# Altium PCB Voltage supply of sEMG & ADC(1).PcbDoc
Units mm, origin at the board's own origin, x right, y up, seen from the top; angles counter-clockwise.
Board outline 51.13 x 56.48 mm, 20 copper layers (F.Cu, F.Mask, B.Cu, B.Mask, In1.Cu, F.SilkS, In2.Cu, B.SilkS, F.Adhes, B.Adhes, F.Paste, B.Paste, Dwgs.User, Cmts.User, Eco1.User, Eco2.User, Edge.Cuts, Margin, B.CrtYd, F.CrtYd); 69 components, 46 nets, 216 pads, 91 vias.
Unrouted connection lines stored in the file: 58.
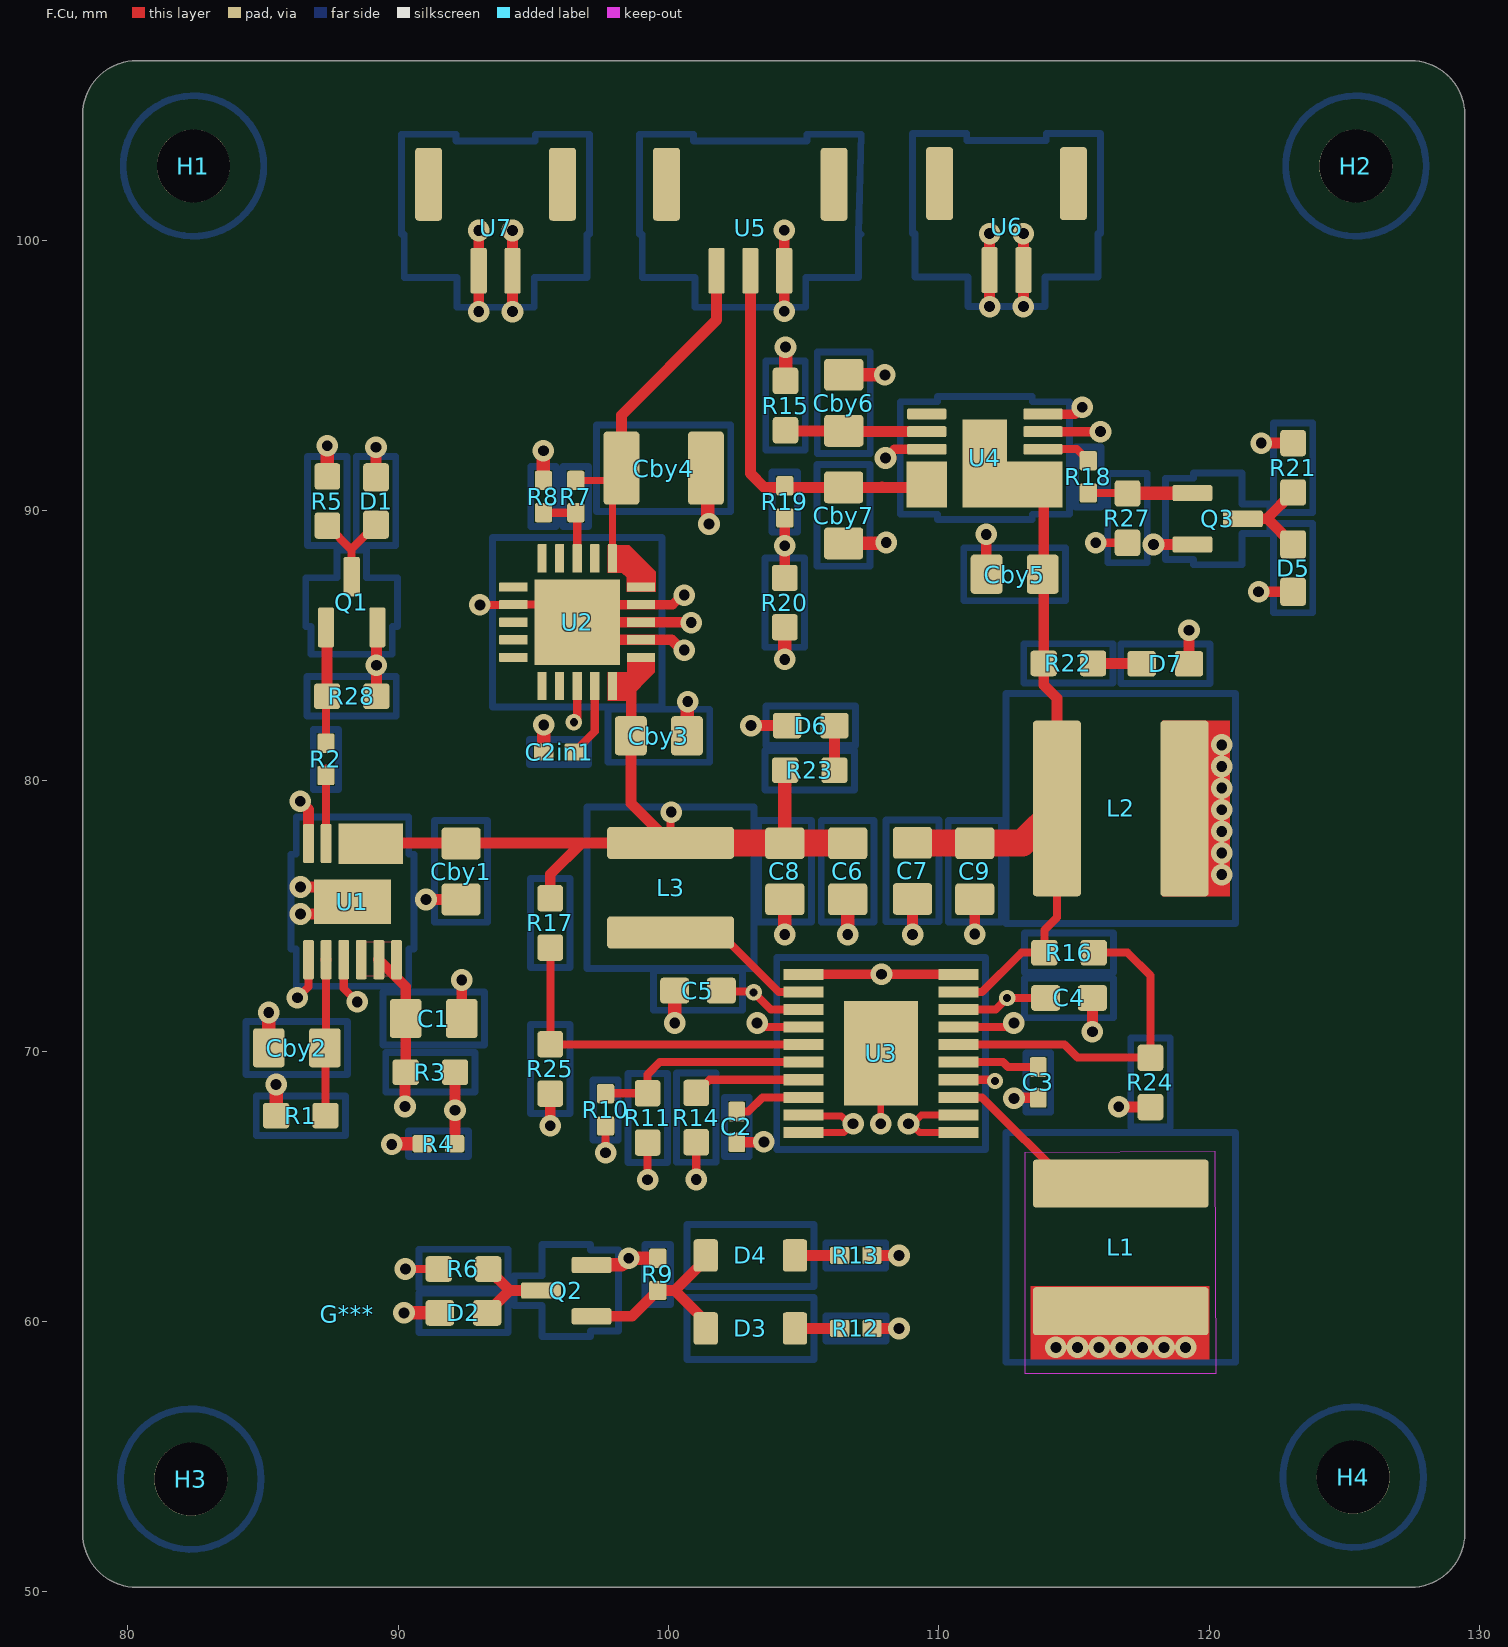
[diagram p0: F.Cu view]
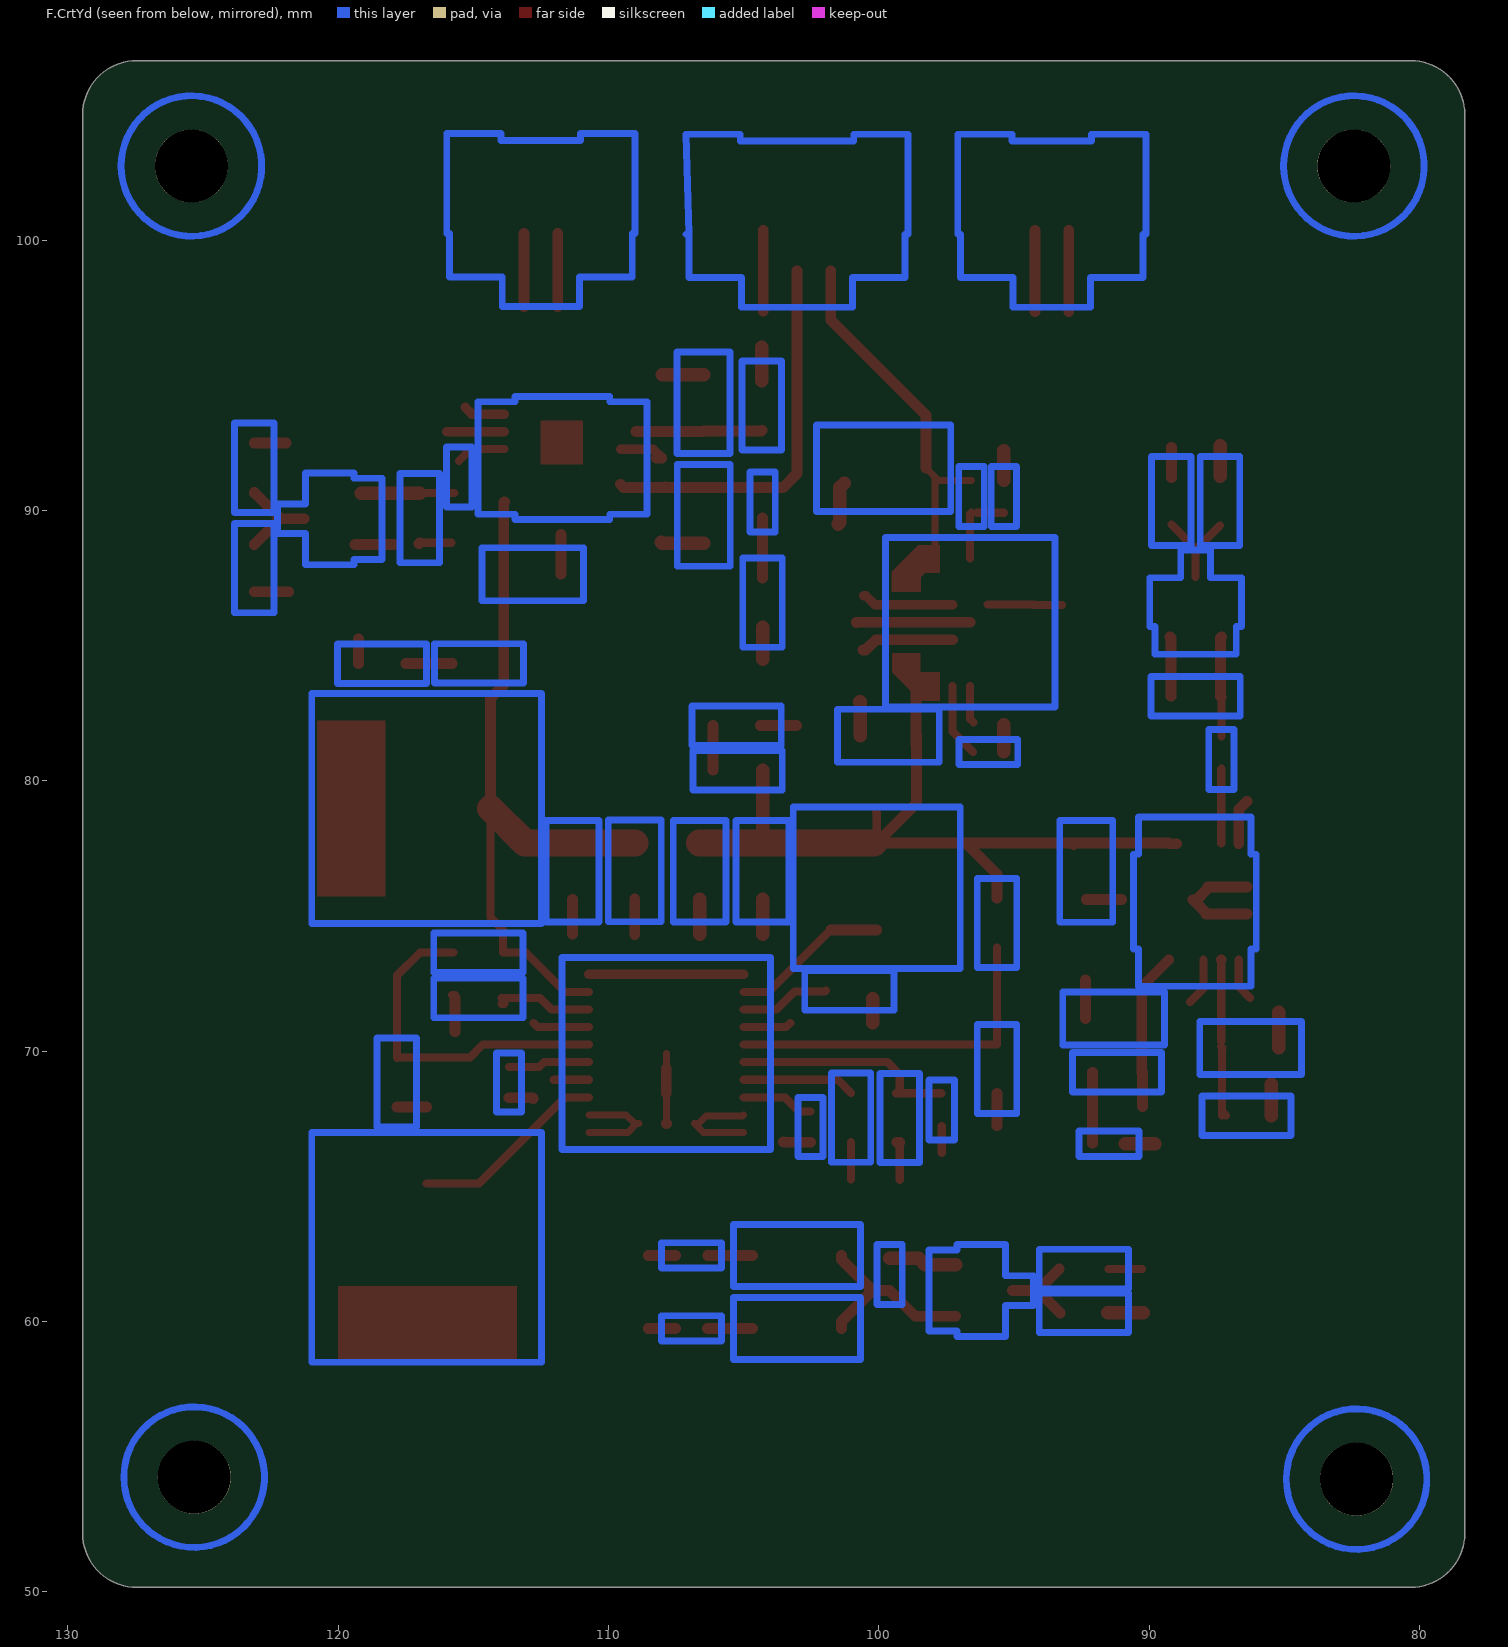
[diagram p1: F.CrtYd view, seen from below]
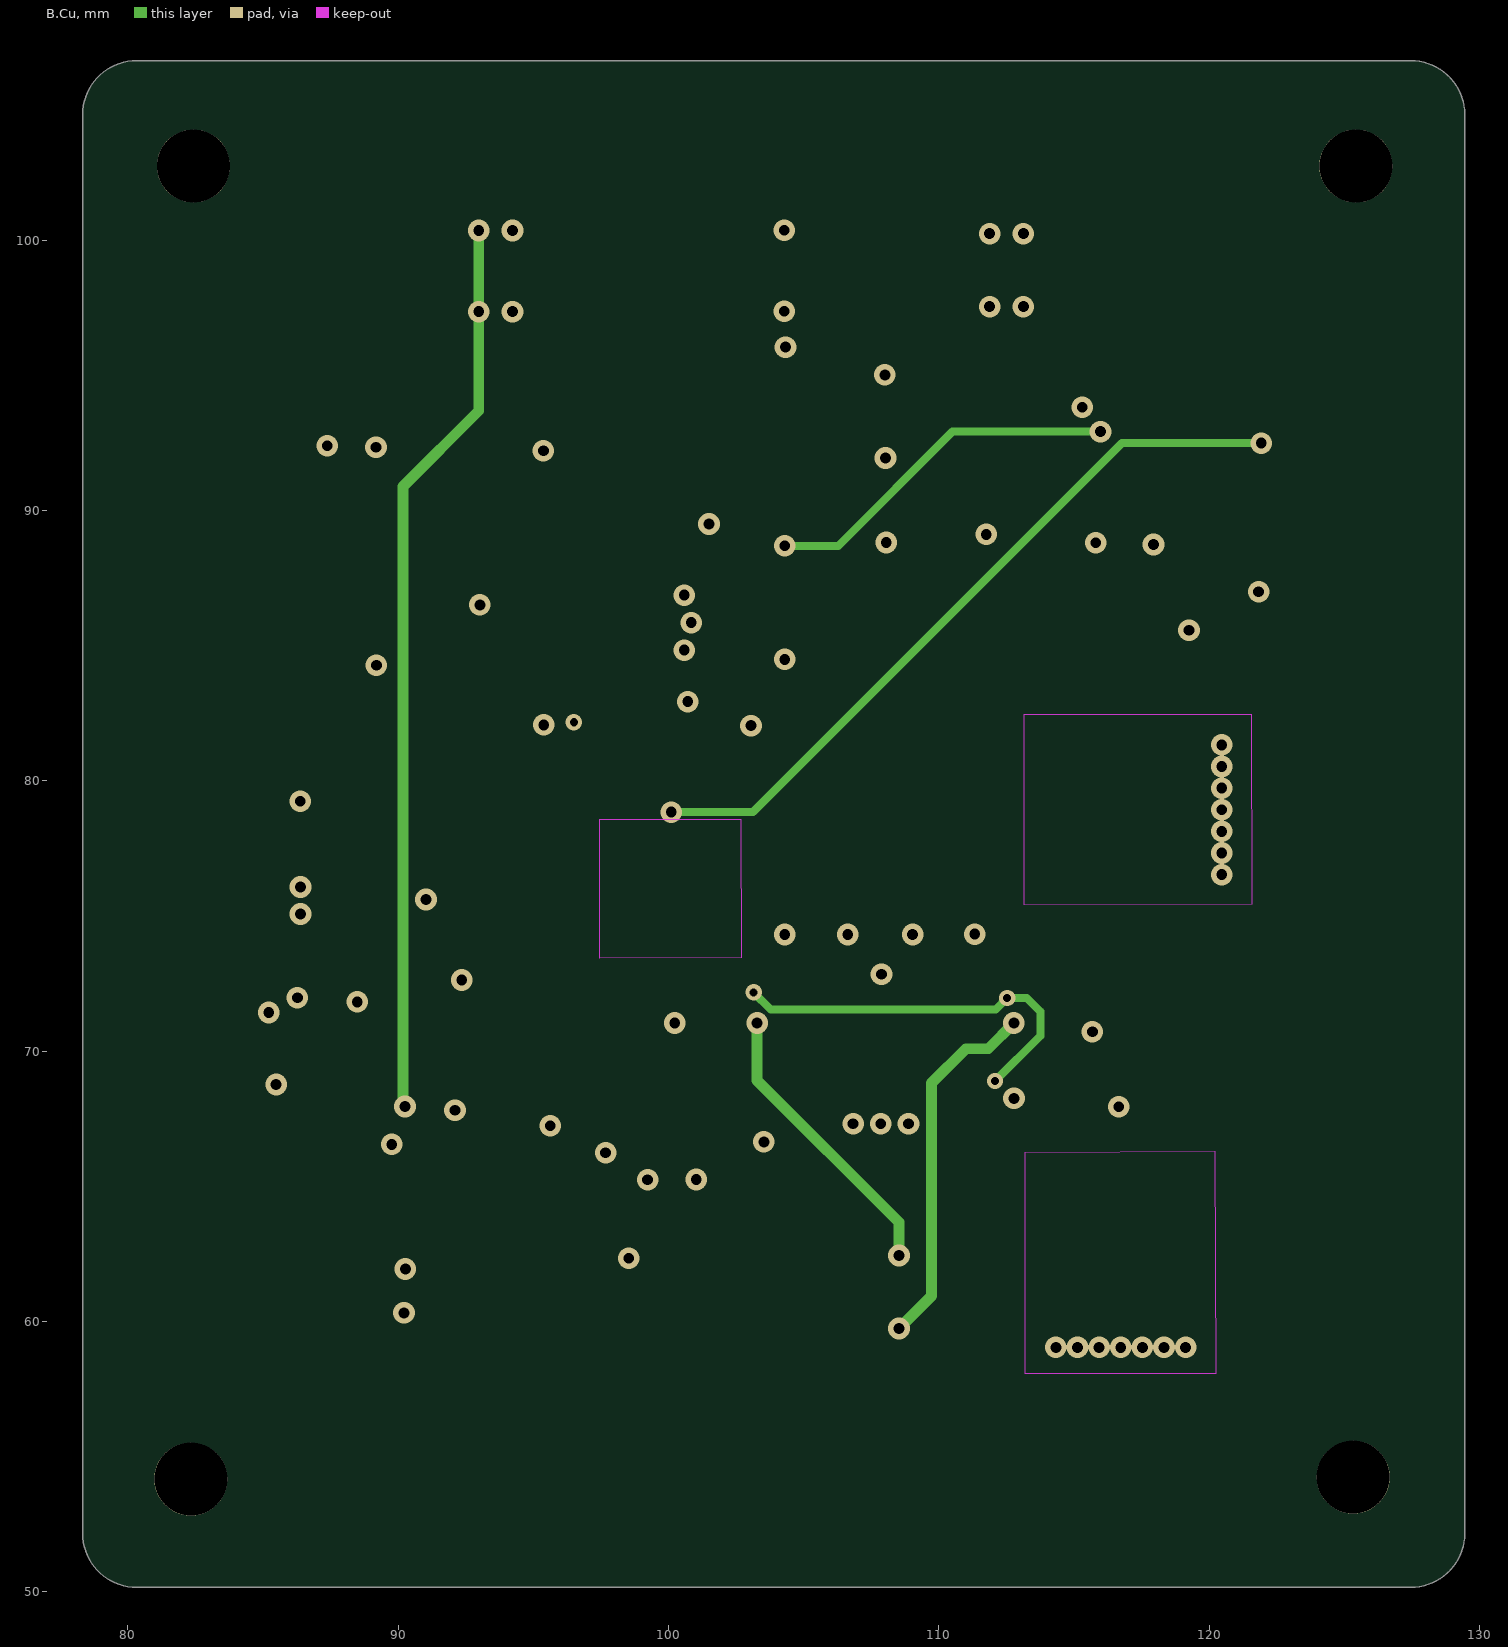
[diagram p2: B.Cu]
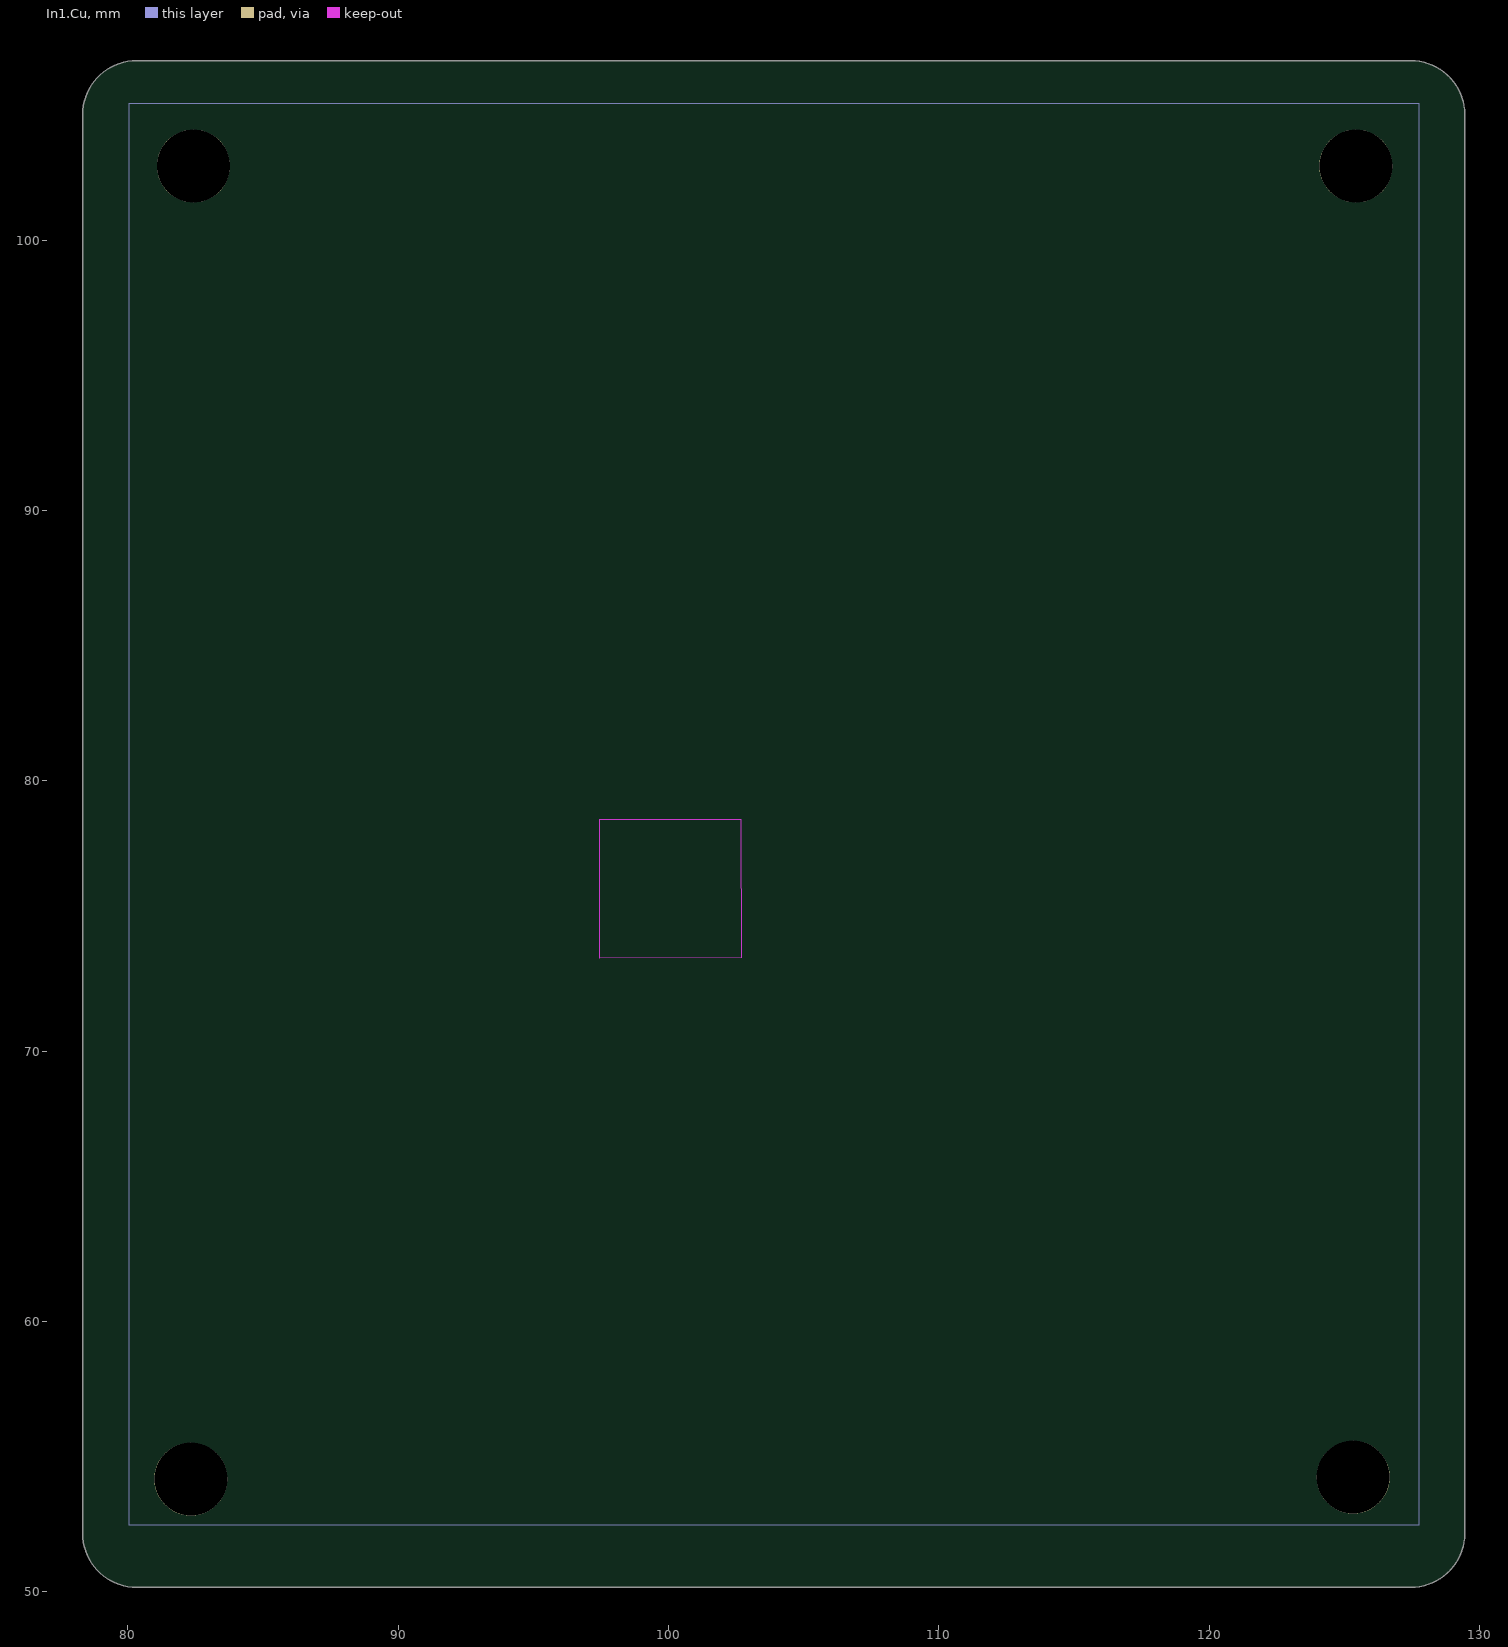
[diagram p3: In1.Cu]
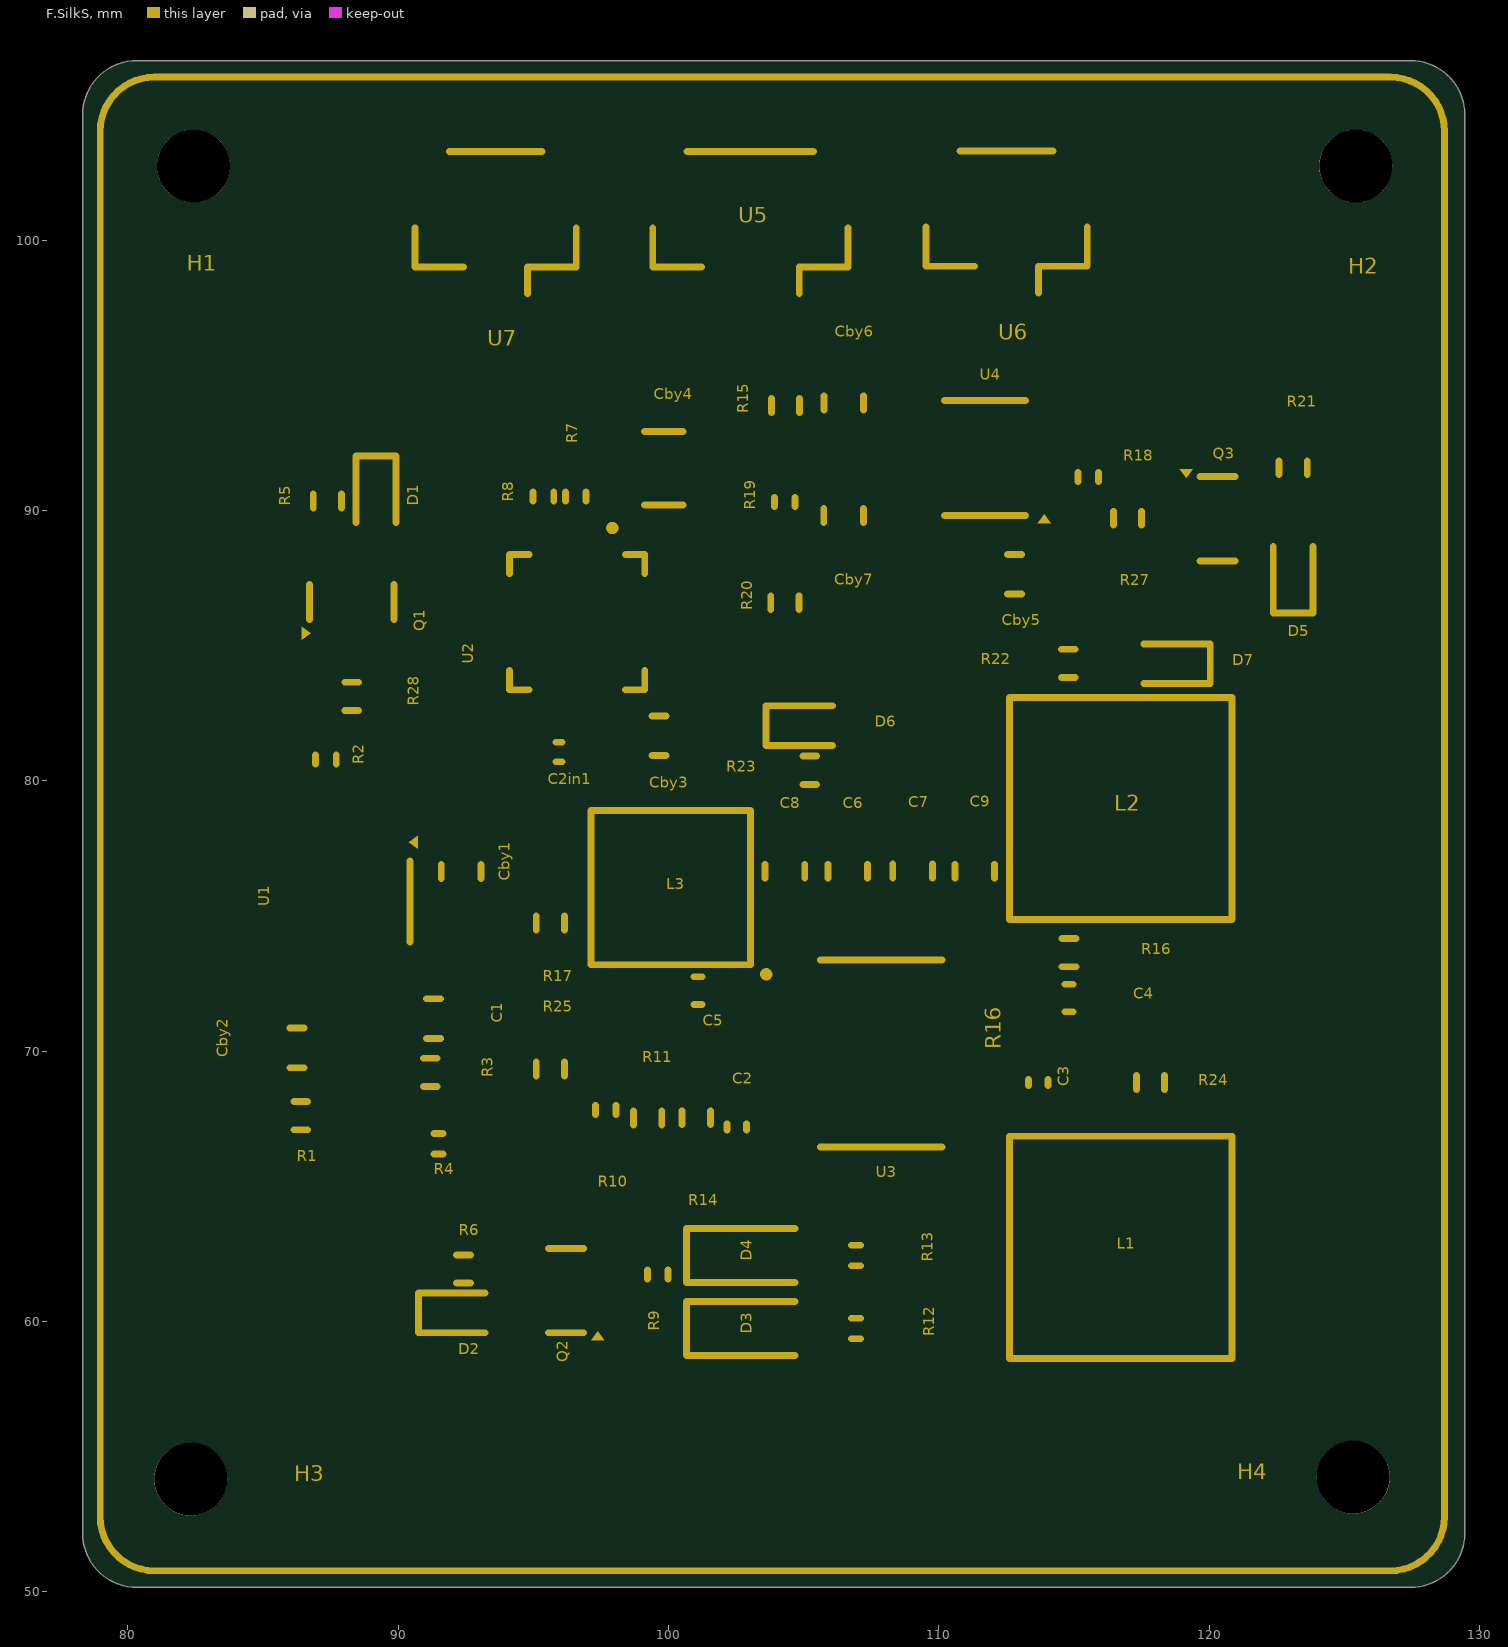
[diagram p4: F.SilkS]
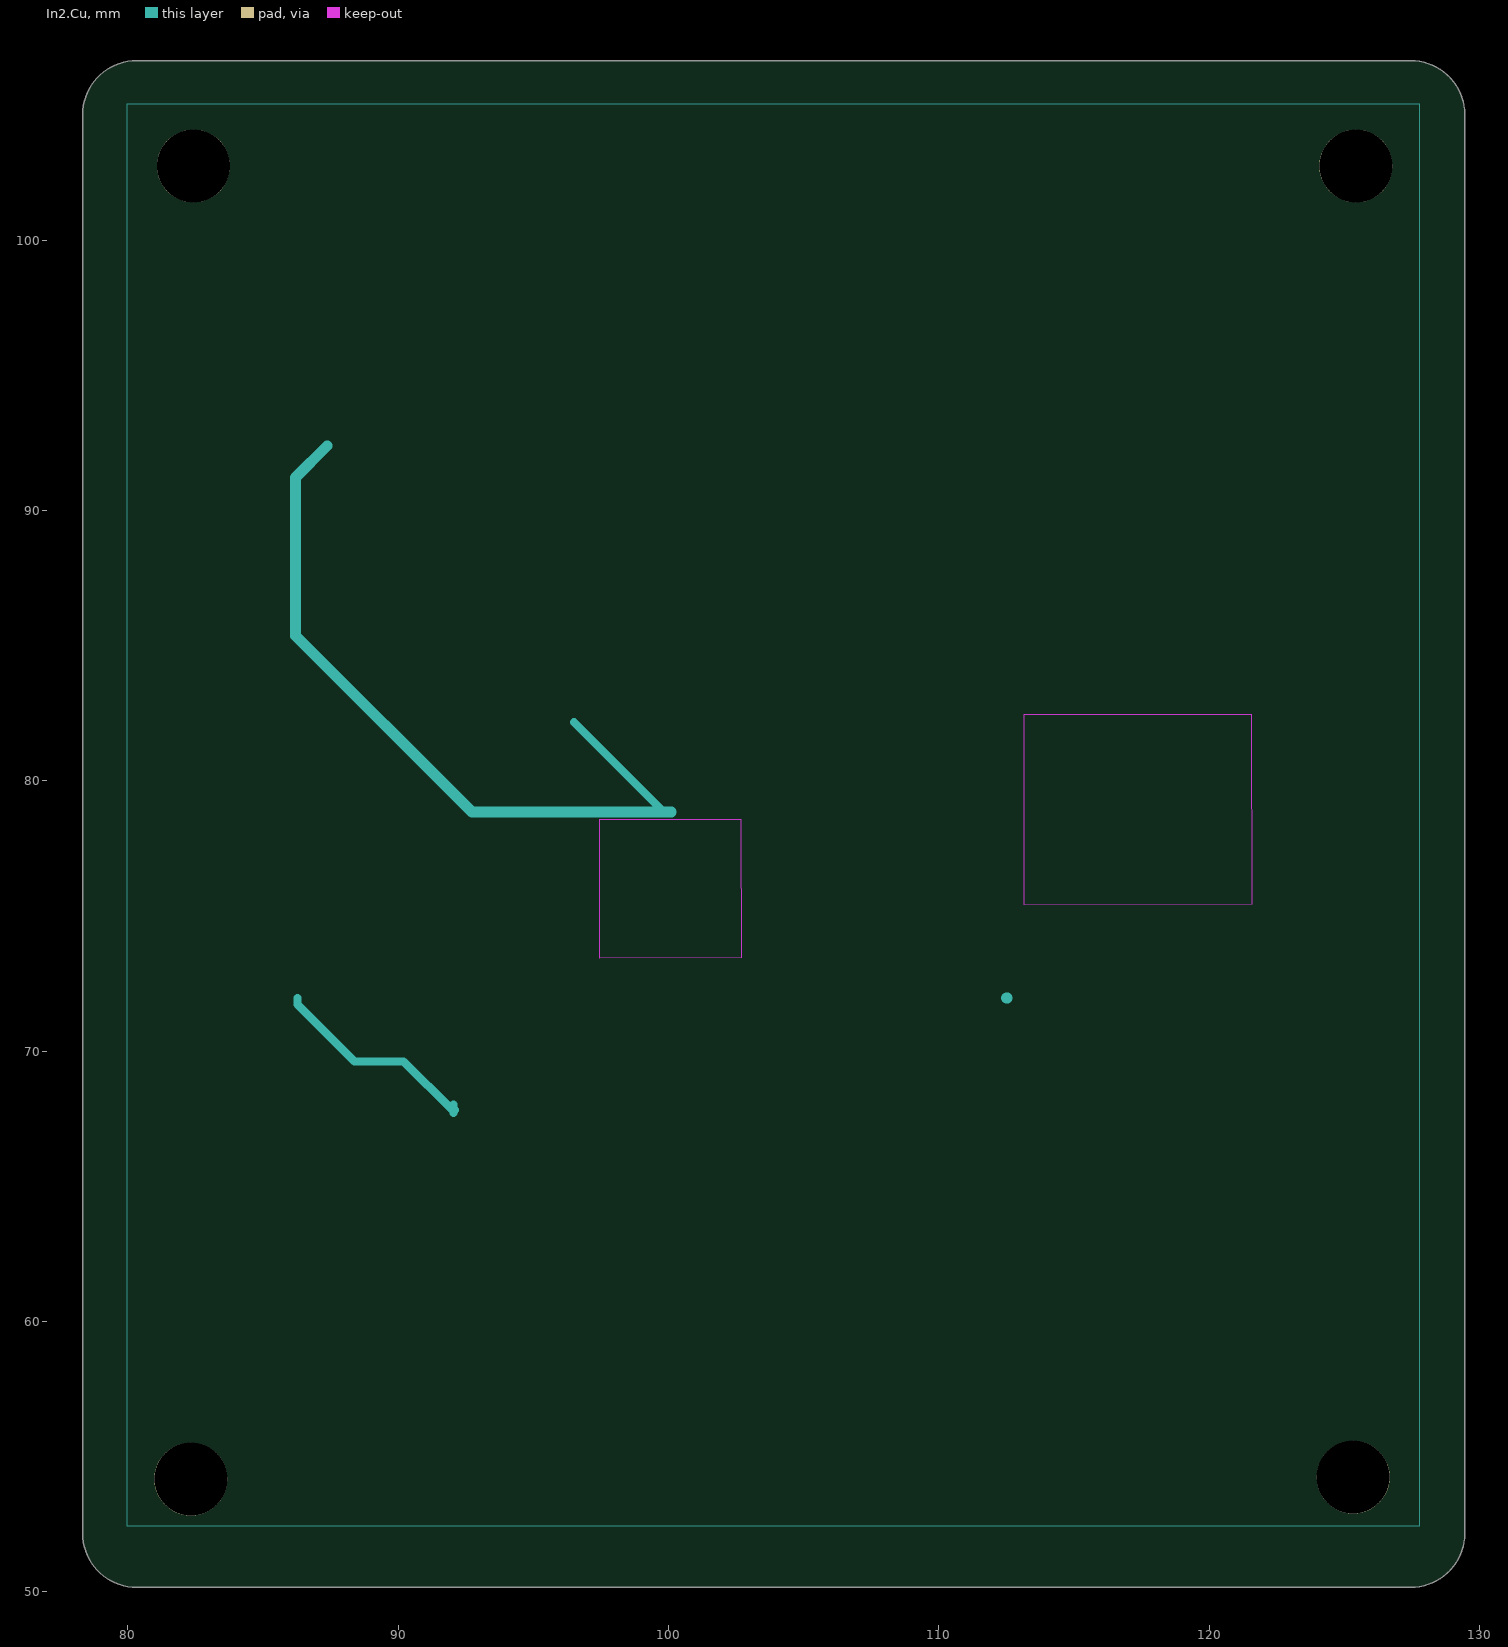
[diagram p5: In2.Cu]
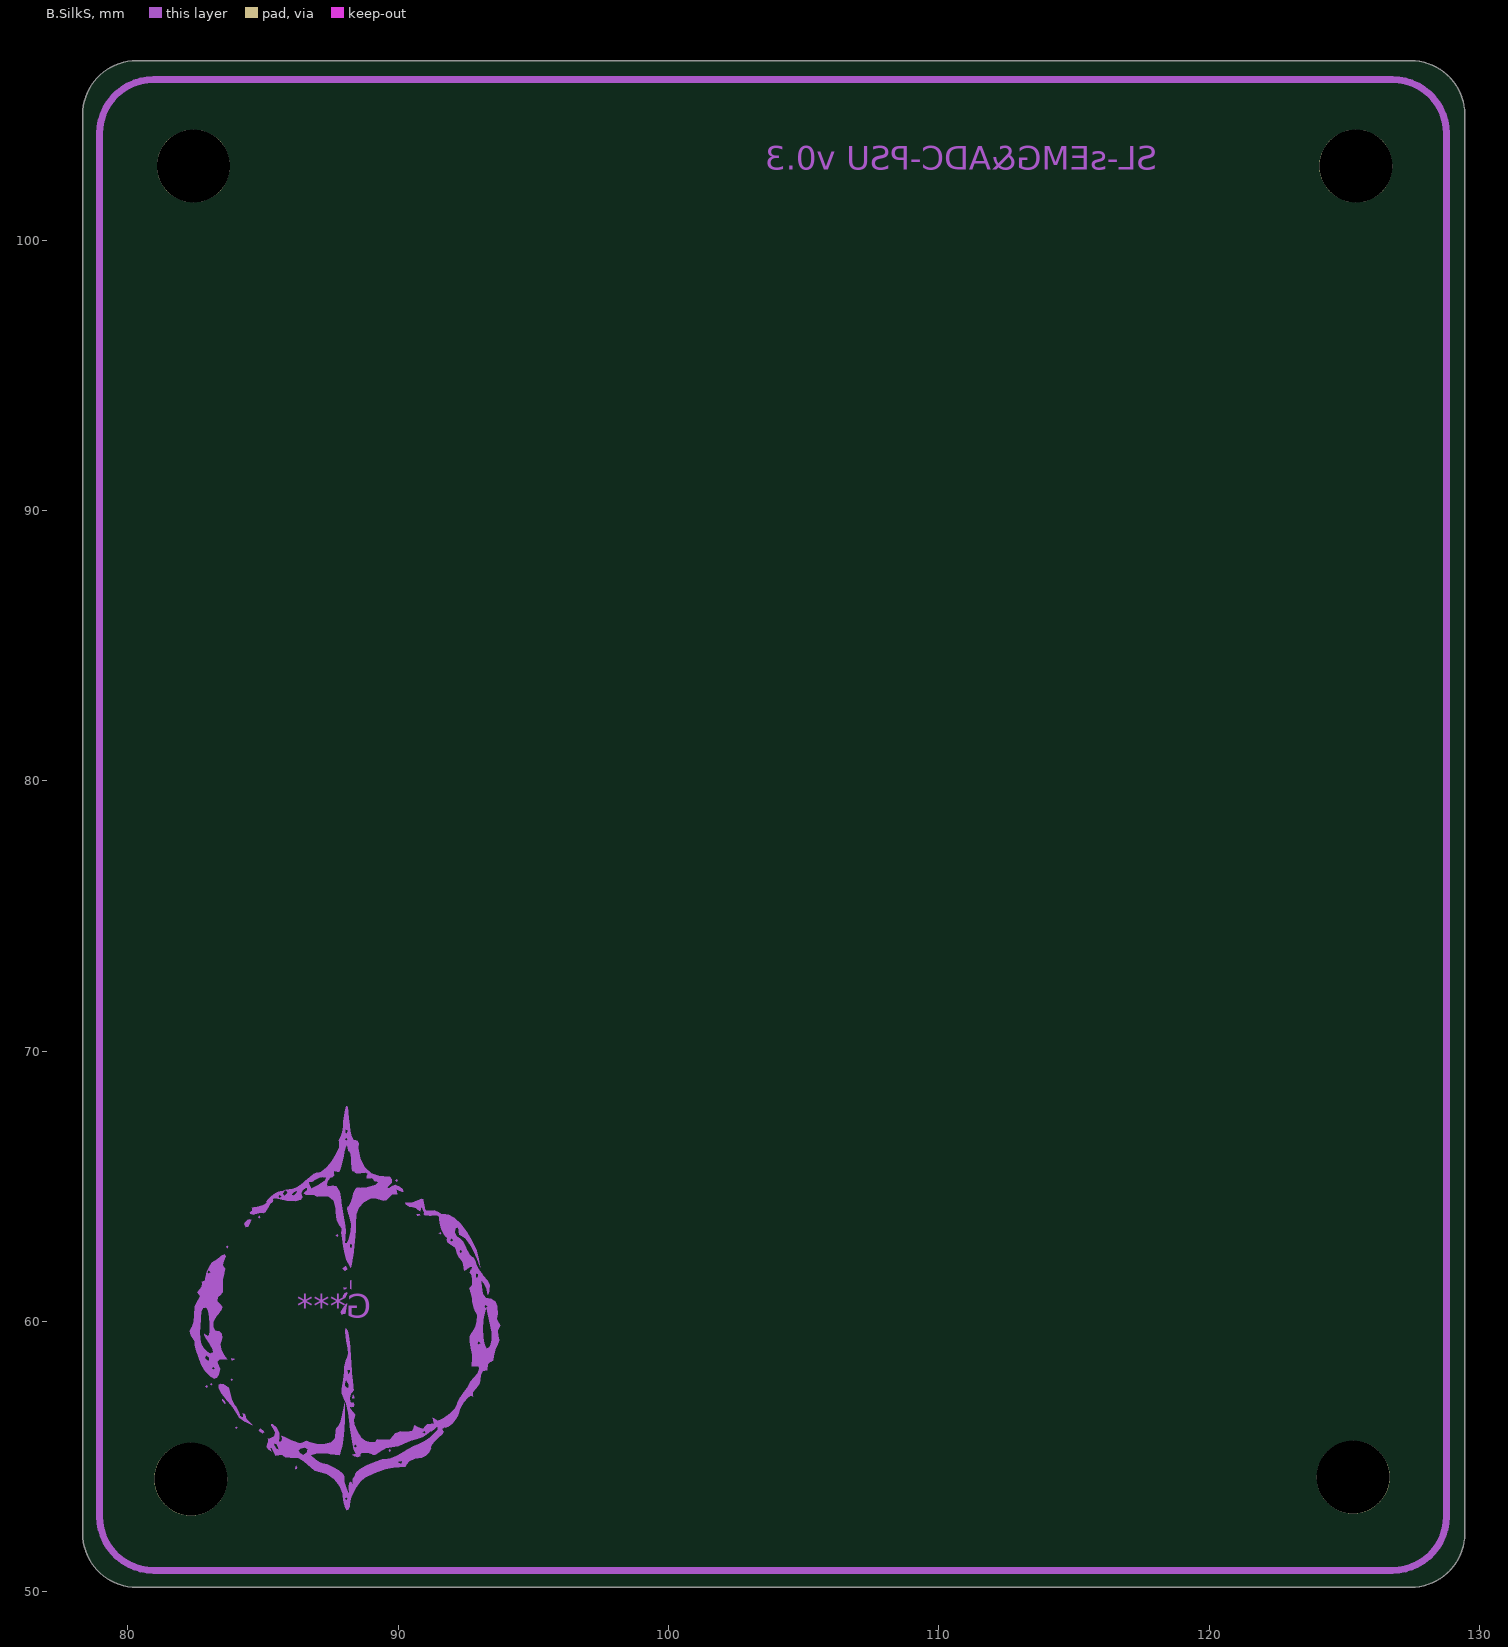
[diagram p6: B.SilkS]
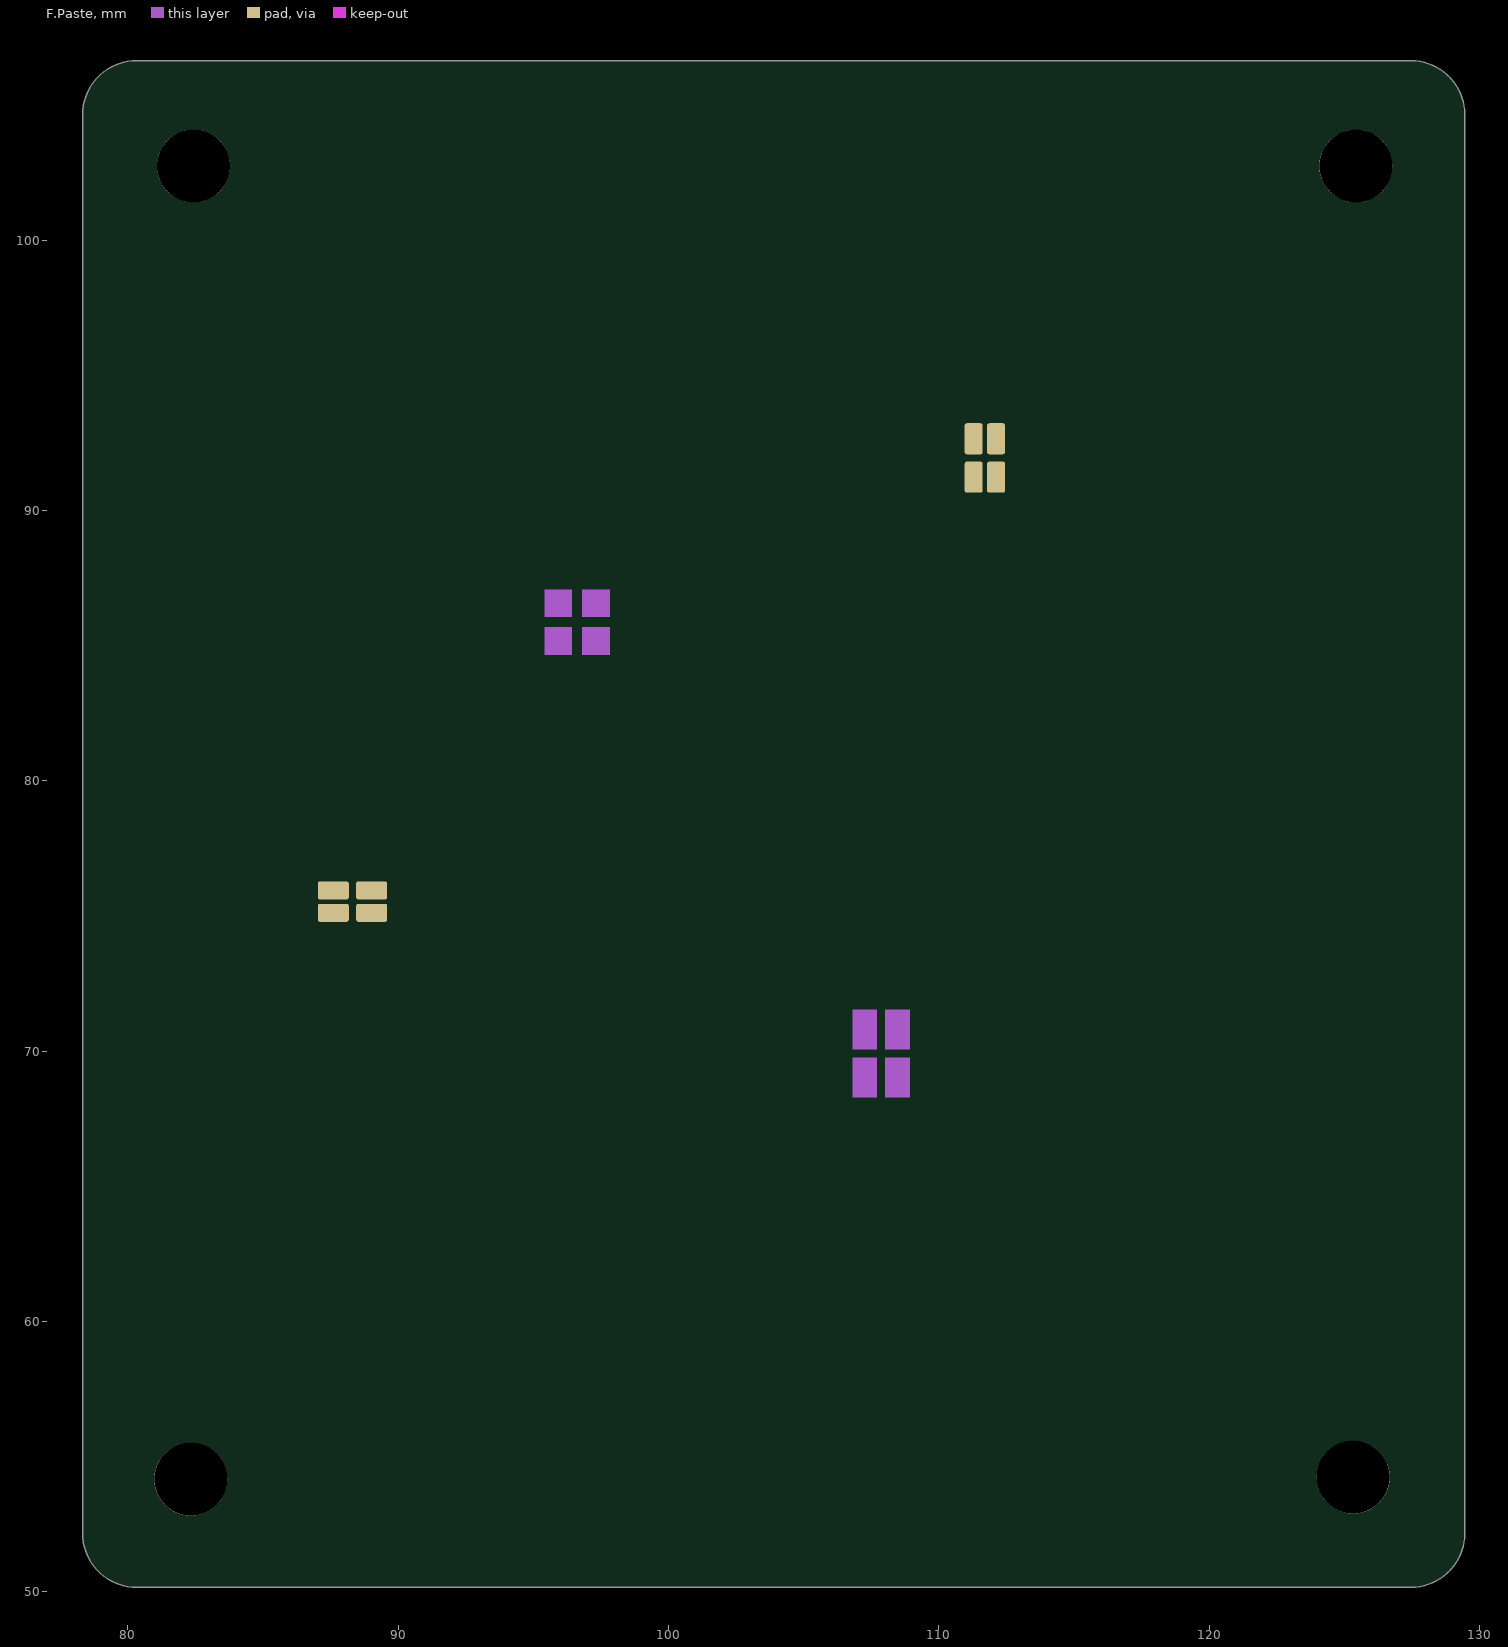
[diagram p7: F.Paste]
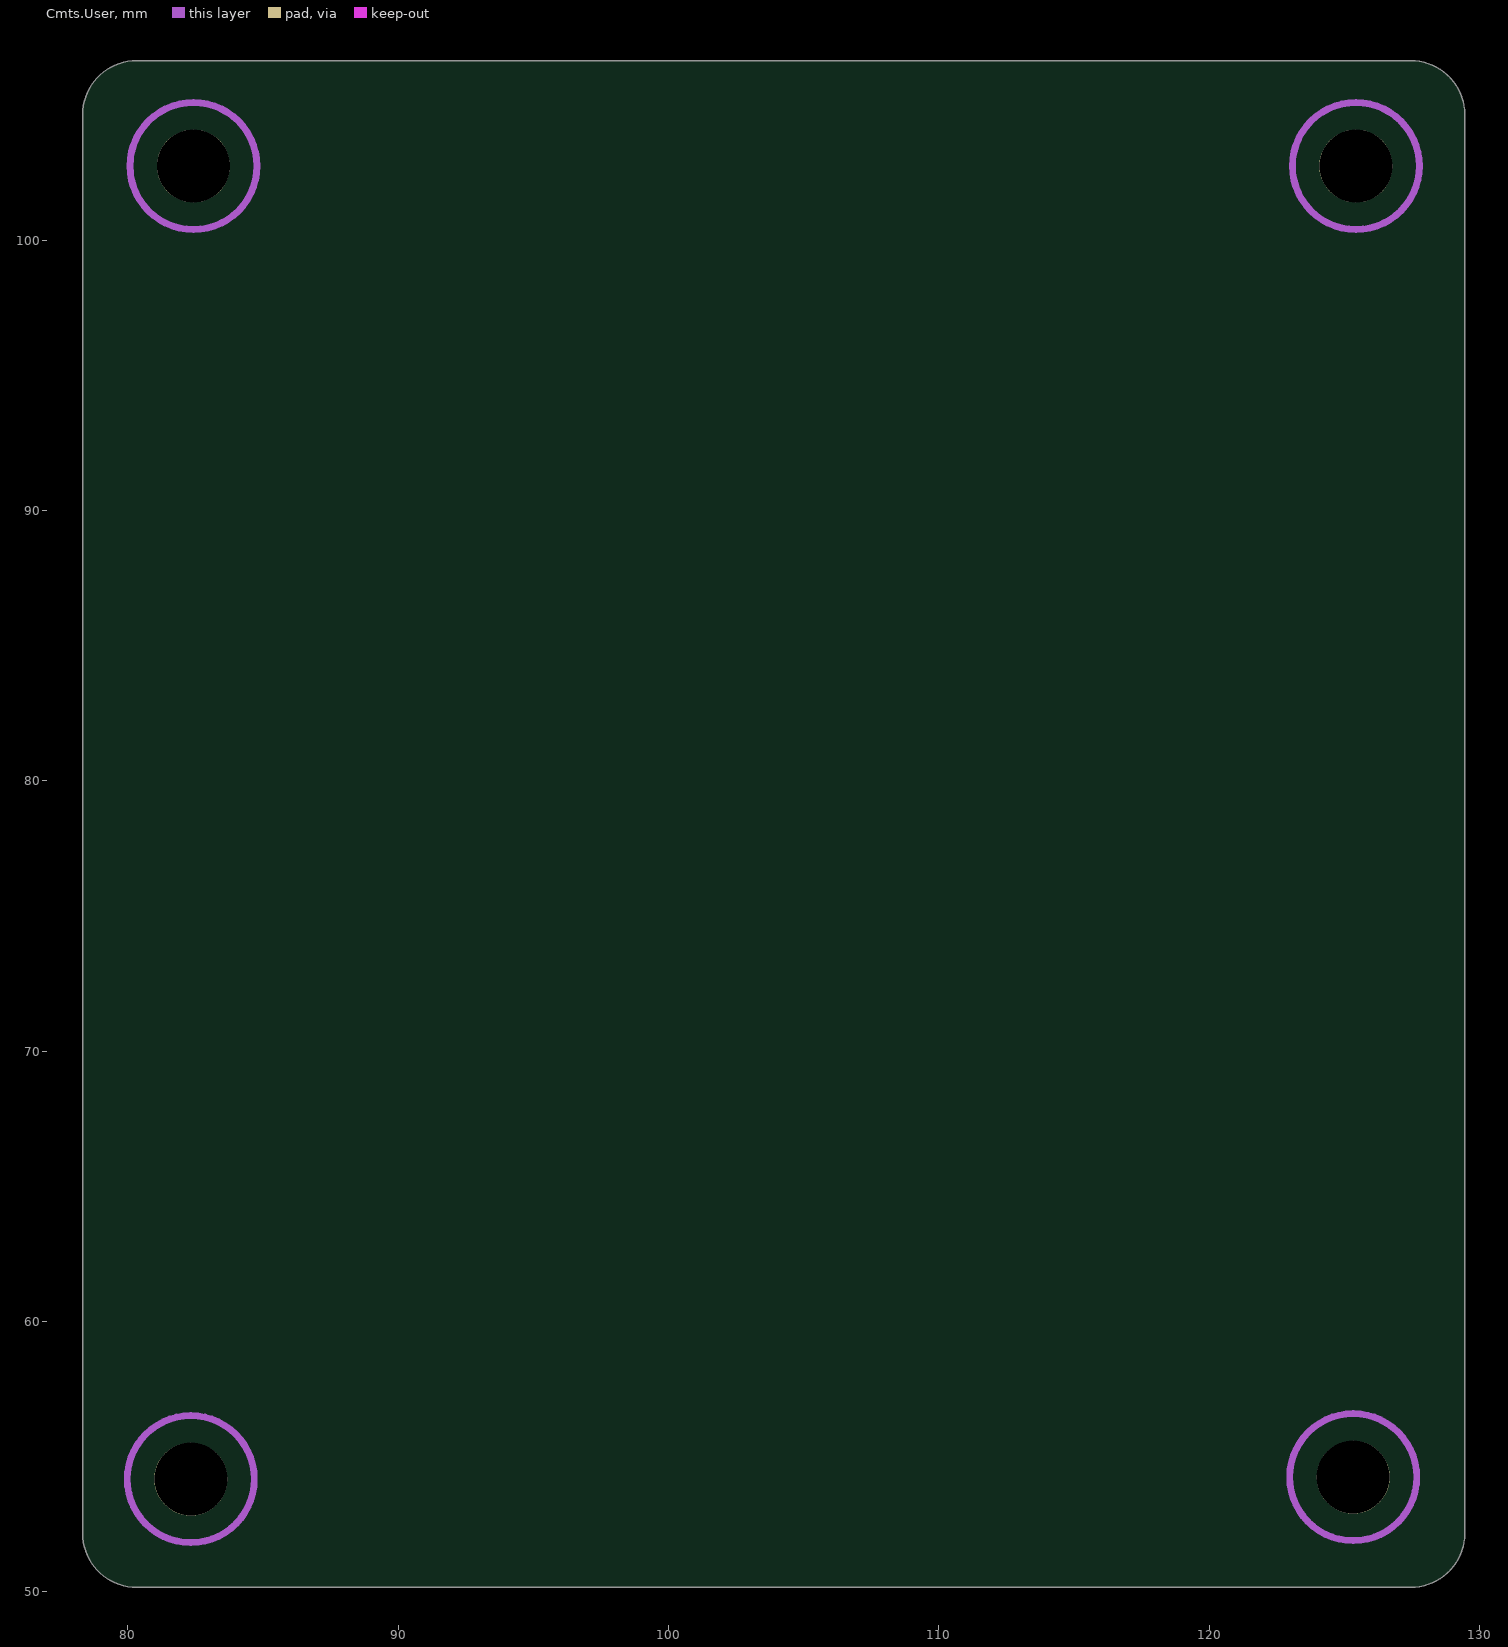
[diagram p8: Cmts.User]
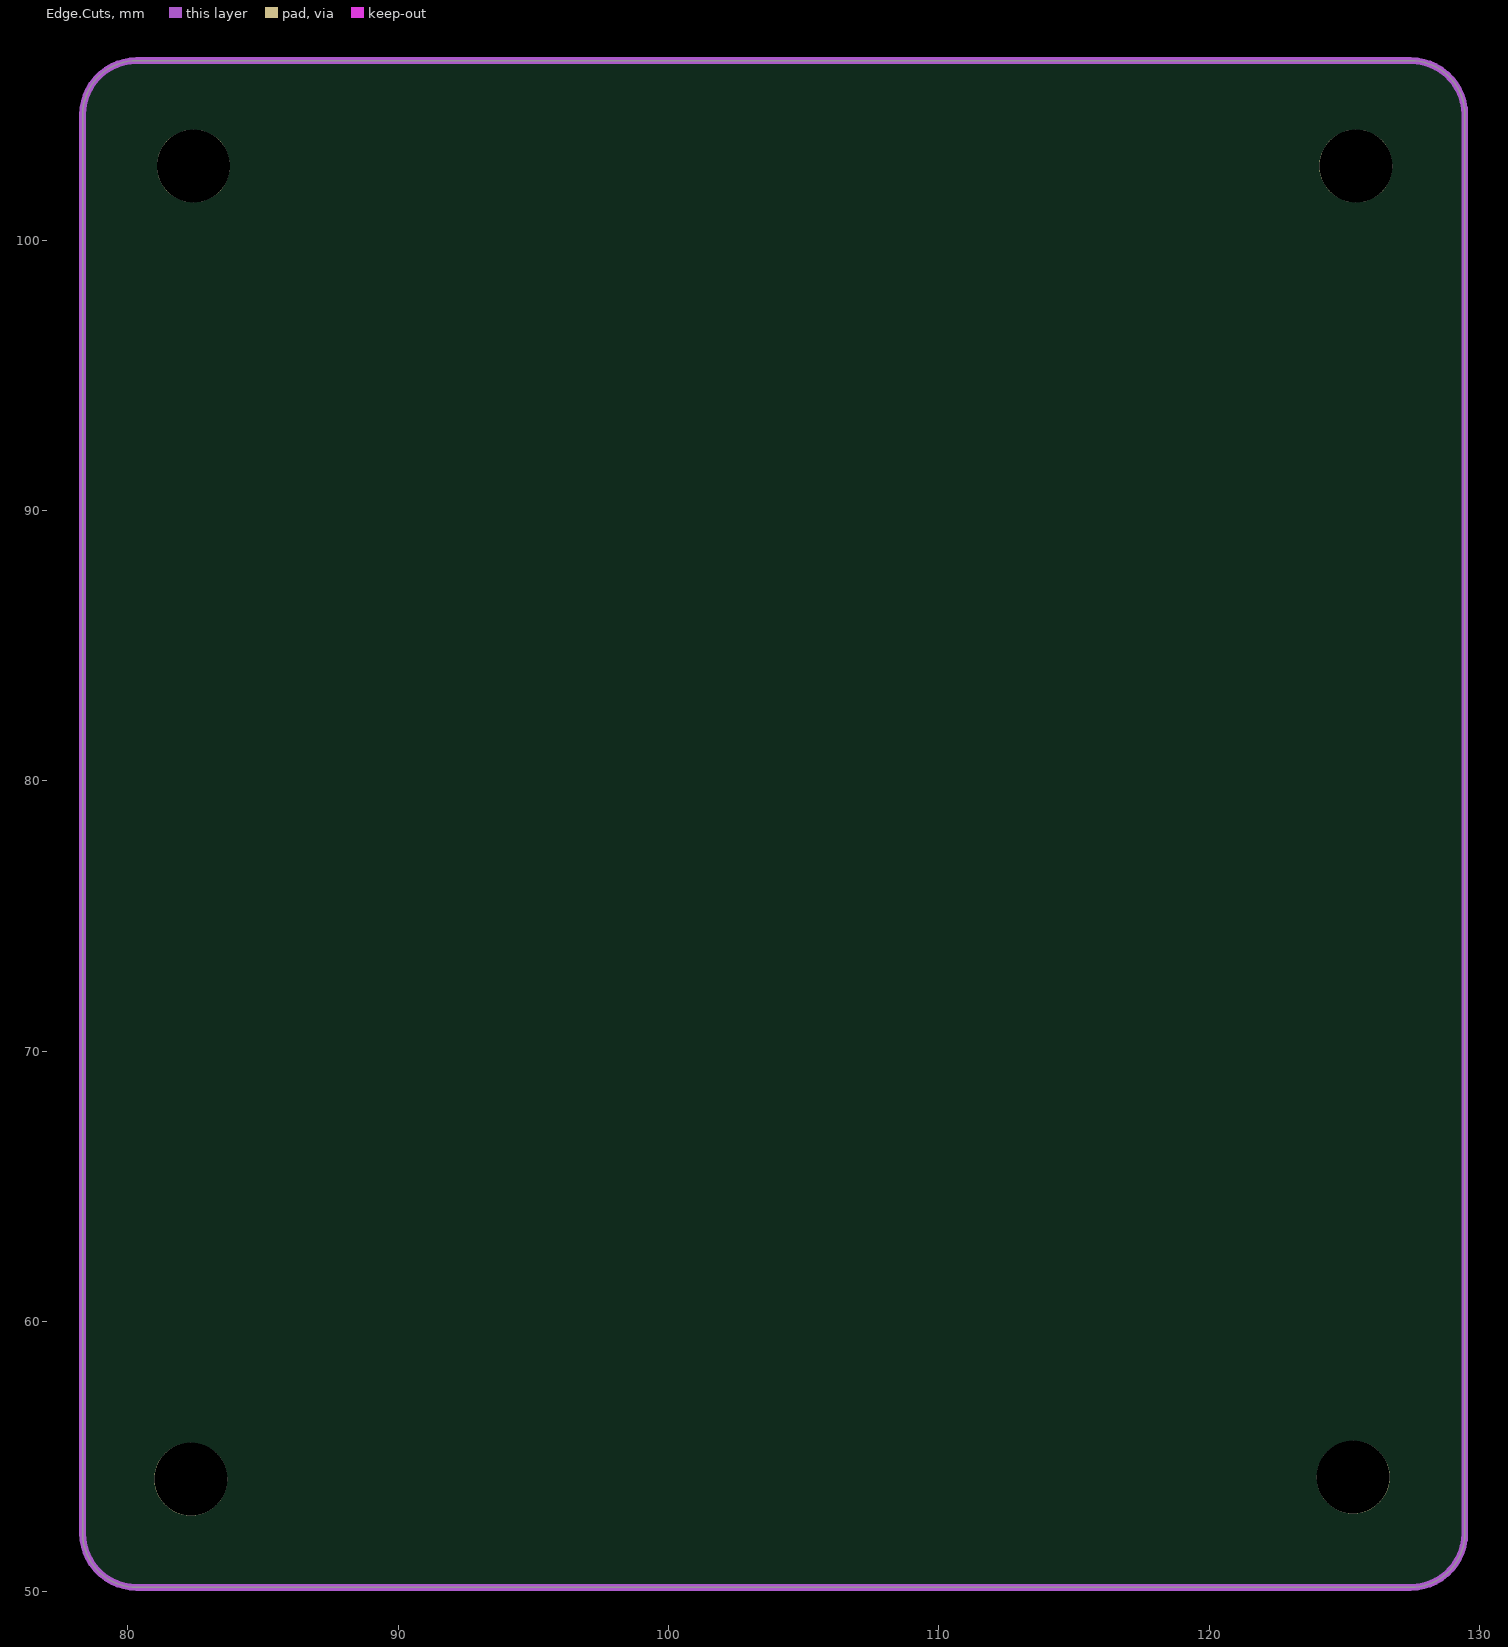
[diagram p9: Edge.Cuts]

## Layer stack, top to bottom
Top Solder: solder mask 0.0102, Solder Resist, Dk 3.5
F.Cu: signal copper 0.0356
Dielectric 1: dielectric 0.32, FR-4, Dk 4.8
F.Mask: signal copper 0.0356
Dielectric2: dielectric 0.32, FR-4, Dk 4.8
B.Cu: signal copper 0.0356
Dielectric3: dielectric 0.32, FR-4, Dk 4.8
B.Mask: signal copper 0.0356
Dielectric4: dielectric 0.32, FR-4, Dk 4.8
In1.Cu: signal copper 0.0356
Dielectric5: dielectric 0.32, FR-4, Dk 4.8
F.SilkS: signal copper 0.0356
Dielectric6: dielectric 0.32, FR-4, Dk 4.8
In2.Cu: signal copper 0.0356
Dielectric7: dielectric 0.32, FR-4, Dk 4.8
B.SilkS: signal copper 0.0356
Dielectric8: dielectric 0.32, FR-4, Dk 4.8
F.Adhes: signal copper 0.0356
Dielectric9: dielectric 0.32, FR-4, Dk 4.8
B.Adhes: signal copper 0.0356
Dielectric10: dielectric 0.32, FR-4, Dk 4.8
F.Paste: signal copper 0.0356
Dielectric11: dielectric 0.32, FR-4, Dk 4.8
B.Paste: signal copper 0.0356
Dielectric12: dielectric 0.32, FR-4, Dk 4.8
Dwgs.User: signal copper 0.0356
Dielectric13: dielectric 0.32, FR-4, Dk 4.8
Cmts.User: signal copper 0.0356
Dielectric14: dielectric 0.32, FR-4, Dk 4.8
Eco1.User: signal copper 0.0356
Dielectric15: dielectric 0.32, FR-4, Dk 4.8
Eco2.User: signal copper 0.0356
Dielectric16: dielectric 0.32, FR-4, Dk 4.8
Edge.Cuts: signal copper 0.0356
Dielectric17: dielectric 0.32, FR-4, Dk 4.8
Margin: signal copper 0.0356
Dielectric18: dielectric 0.32, FR-4, Dk 4.8
B.CrtYd: signal copper 0.0356
Dielectric19: dielectric 0.32, FR-4, Dk 4.8
F.CrtYd: signal copper 0.0356
Bottom Solder: solder mask 0.0102, Solder Resist, Dk 3.5

## Board outline
78.328,52.165 ccw(c80.328,52.165) 80.328,50.165 127.453,50.165 ccw(c127.453,52.165) 129.453,52.165 129.453,104.64 ccw(c127.453,104.64) 127.453,106.64 80.328,106.64 ccw(c80.328,104.64) 78.328,104.64

## Design rules (kind name [scope] priority, off if disabled: settings)
Clearance "Clearence 3_PadClass" [InPadClass('Pad Class Clearance 3')] p1: gap=3 ignorepadtopadclearanceinfootprint=FALSE
Clearance "Clearence 0.5_Polygon" [InNamedPolygon('In1.Cu-GND') OR InNamedPolygon('In2.Cu-/+11.1V')] p2: gap=0.5 ignorepadtopadclearanceinfootprint=FALSE
MinimumSolderMaskSliver [All] p1: minsoldermaskwidth=0
PolygonConnect Polygon_In2.Cu-/+11.1V_ConnectDirect [IsNamedPolygon('In2.Cu-/+11.1V') vs IsVia] p1: connectstyle=Direct reliefconductorwidth=0.254 reliefentries=4 polygonreliefangle="90 Angle" airgapwidth=0.254
PolygonConnect Polygon_In2.Cu-/+11.1V_ConnectRelief45 [IsNamedPolygon('In2.Cu-/+11.1V') vs (IsThruPin or IsSMTPin) and (PadShape_AllLayers = 'Round')] p2: connectstyle=Relief reliefconductorwidth=0.5 reliefentries=4 polygonreliefangle="45 Angle" airgapwidth=0.5
PolygonConnect Polygon_In2.Cu-/+11.1V_ConnectRelief90 [IsNamedPolygon('In2.Cu-/+11.1V') vs (IsThruPin or IsSMTPin) and (PadShape_AllLayers <> 'Round')] p3: connectstyle=Relief reliefconductorwidth=0.5 reliefentries=4 polygonreliefangle="90 Angle" airgapwidth=0.5
PolygonConnect Polygon_In1.Cu-GND_ConnectDirect [IsNamedPolygon('In1.Cu-GND') vs IsVia] p4: connectstyle=Direct reliefconductorwidth=0.254 reliefentries=4 polygonreliefangle="90 Angle" airgapwidth=0.254
PolygonConnect Polygon_In1.Cu-GND_ConnectRelief45 [IsNamedPolygon('In1.Cu-GND') vs (IsThruPin or IsSMTPin) and (PadShape_AllLayers = 'Round')] p5: connectstyle=Relief reliefconductorwidth=0.5 reliefentries=4 polygonreliefangle="45 Angle" airgapwidth=0.5
PolygonConnect Polygon_In1.Cu-GND_ConnectRelief90 [IsNamedPolygon('In1.Cu-GND') vs (IsThruPin or IsSMTPin) and (PadShape_AllLayers <> 'Round')] p6: connectstyle=Relief reliefconductorwidth=0.5 reliefentries=4 polygonreliefangle="90 Angle" airgapwidth=0.5
RoutingVias [All] p1: holewidth=0.711 width=1.27 viastyle="Through Hole" minholewidth=0.711 minwidth=1.27 maxholewidth=0.711 maxwidth=1.27
SilkToSilkClearance [All] p1: silktosilkclearance=0
SilkToSolderMaskClearance [IsPad] p1: minsilkscreentomaskgap=0 clearancetoexposedcopper=TRUE
SolderMaskExpansion [All] p1: expansion=0.102 istentingtop=FALSE
Width [All] p1: maxlimit=10 minlimit=0.254 preferedwidth=0.254 midlayer1_maxwidth=0.254 midlayer3_maxwidth=0.254 midlayer9_maxwidth=0.254 midlayer11_maxwidth=0.254 midlayer15_maxwidth=0.254 midlayer17_maxwidth=0.254 midlayer21_maxwidth=0.254 midlayer23_maxwidth=0.254 midlayer27_maxwidth=0.254 midlayer29_maxwidth=0.254 minimp=50.000000 maximp=50.000000 favimp=50.000000
27 further rules are at their usual default settings.

## Classes and differential pairs
pad class "Pad Class Clearance 3": H1-Un1 H2-Un1 H3-Un1 H4-Un1

## Components (designator, comment, footprint, x,y, rotation, side; value= is the part's Value field where it differs from the comment)
C1 "Comment" C_0805_2012Metric_Pad1.18x1.45mm_HandSolder 91.315,71.205 r0 top value=10u
C2 "Comment" C_0402_1005Metric_Pad0.74x0.62mm_HandSolder 102.528,67.197 r270 top value=100n
C2in1 "Comment" C_0402_1005Metric_Pad0.74x0.62mm_HandSolder 95.951,81.067 r180 top value=1uF
C3 "Comment" C_0402_1005Metric_Pad0.74x0.62mm_HandSolder 113.678,68.842 r270 top value=100n
C4 "Comment" C_0603_1608Metric_Pad1.08x0.95mm_HandSolder 114.816,71.967 r180 top value=1uF
C5 "Comment" C_0603_1608Metric_Pad1.08x0.95mm_HandSolder 101.09,72.242 r180 top value=1uF
C6 "Comment" C_0805_2012Metric_Pad1.18x1.45mm_HandSolder 106.628,76.655 r270 top value=10uF
C7 "Comment" C_0805_2012Metric_Pad1.18x1.45mm_HandSolder 109.028,76.667 r90 top value=10uF
C8 "Comment" C_0805_2012Metric_Pad1.18x1.45mm_HandSolder 104.303,76.655 r270 top value=10uF
C9 "Comment" C_0805_2012Metric_Pad1.18x1.45mm_HandSolder 111.328,76.655 r90 top value=10uF
Cby1 "Comment" C_0805_2012Metric_Pad1.18x1.45mm_HandSolder 92.328,76.647 r270 top value=10u
Cby2 "Comment" C_0805_2012Metric_Pad1.18x1.45mm_HandSolder 86.251,70.122 r180 top value=0.47uF
Cby3 "Comment" C_0805_2012Metric_Pad1.18x1.45mm_HandSolder 99.646,81.667 r0 top value=10u
Cby4 "Comment" C_1210_3225Metric_Pad1.33x2.70mm_HandSolder 99.822,91.567 r0 top value=47u
Cby5 "Comment" C_0805_2012Metric_Pad1.18x1.45mm_HandSolder 112.803,87.642 r180 top value=10u
Cby6 "Comment" C_0805_2012Metric_Pad1.18x1.45mm_HandSolder 106.483,93.982 r90 top value=4.7uF
Cby7 "Comment" C_0805_2012Metric_Pad1.18x1.45mm_HandSolder 106.478,89.817 r270 top value=10u
D1 "Comment" LED_0603_1608Metric_Pad1.05x0.95mm_HandSolder 89.18,90.35 r270 top value=LED
D2 "Comment" LED_0603_1608Metric_Pad1.05x0.95mm_HandSolder 92.415,60.317 r0 top value=LED
D3 "Comment" D_SOD-123 103.028,59.742 r0 top value=D
D4 "Comment" D_SOD-123 103.028,62.442 r0 top value=D
D5 "Comment" LED_0603_1608Metric_Pad1.05x0.95mm_HandSolder 123.103,87.867 r90 top value=LED
D6 "Comment" LED_0603_1608Metric_Pad1.05x0.95mm_HandSolder 105.263,82.042 r0 top value=LED
D7 "Comment" LED_0603_1608Metric_Pad1.05x0.95mm_HandSolder 118.378,84.33 r180 top value=LED
G*** "Comment" LOGO 88.122,60.262 r180 top value=LOGO
H1 "Comment" MountingHole_2.7mm_M2.5_DIN965 82.428,102.742 r0 top value=MountingHole
H2 "Comment" MountingHole_2.7mm_M2.5_DIN965 125.428,102.742 r0 top value=MountingHole
H3 "Comment" MountingHole_2.7mm_M2.5_DIN965 82.328,54.169 r0 top value=MountingHole
H4 "Comment" MountingHole_2.7mm_M2.5_DIN965 125.328,54.242 r0 top value=MountingHole
L1 "Comment" L_Coilcraft_XAL7030-102 116.728,62.742 r90 top value=6.8uH
L2 "Comment" L_Coilcraft_XAL7030-102 116.728,78.977 r180 top value=6.8uH
L3 "Comment" L_Coilcraft_XAL5030-XXX 100.078,76.047 r90 top value=3.3uH
Q1 "Comment" SOT-23 88.28,86.613 r90 top value=BC817
Q2 "Comment" SOT-23 96.215,61.142 r180 top value=BC817
Q3 "Comment" SOT-23 120.315,89.692 r0 top value=BC817
R1 "Comment" R_0603_1608Metric_Pad0.98x0.95mm_HandSolder 86.398,67.615 r180 top value=49.9k
R2 "Comment" R_0402_1005Metric_Pad0.72x0.64mm_HandSolder 87.328,80.792 r90 top value=10k
R3 "Comment" R_0603_1608Metric_Pad0.98x0.95mm_HandSolder 91.191,69.217 r180 top value=145k
R4 "Comment" R_0402_1005Metric_Pad0.72x0.64mm_HandSolder 91.491,66.577 r0 top value=10k
R5 "Comment" R_0603_1608Metric_Pad0.98x0.95mm_HandSolder 87.381,90.35 r90 top value=5k
R6 "Comment" R_0603_1608Metric_Pad0.98x0.95mm_HandSolder 92.415,61.942 r180 top value=5k
R7 "Comment" R_0402_1005Metric_Pad0.72x0.64mm_HandSolder 96.573,90.515 r270 top value=29.4k
R8 "Comment" R_0402_1005Metric_Pad0.72x0.64mm_HandSolder 95.373,90.515 r90 top value=10k
R9 "Comment" R_0402_1005Metric_Pad0.72x0.64mm_HandSolder 99.604,61.742 r90 top value=10k
R10 "Comment" R_0402_1005Metric_Pad0.72x0.64mm_HandSolder 97.673,67.83 r270 top value=23.7k
R11 "Comment" R_0603_1608Metric_Pad0.98x0.95mm_HandSolder 99.228,67.53 r90 top value=3.48k
R12 "Comment" R_0402_1005Metric_Pad0.72x0.64mm_HandSolder 106.93,59.742 r180 top value=10k
R13 "Comment" R_0402_1005Metric_Pad0.72x0.64mm_HandSolder 106.928,62.442 r180 top value=10k
R14 "Comment" R_0603_1608Metric_Pad0.98x0.95mm_HandSolder 101.028,67.542 r270 top value=85k
R15 "Comment" R_0603_1608Metric_Pad0.98x0.95mm_HandSolder 104.328,93.882 r90 top value=54.9k
R16 "Comment" R_0603_1608Metric_Pad0.98x0.95mm_HandSolder 114.816,73.642 r0 top value=68k
R17 "Comment" R_0603_1608Metric_Pad0.98x0.95mm_HandSolder 95.628,74.742 r270 top value=68k
R18 "Comment" R_0402_1005Metric_Pad0.72x0.64mm_HandSolder 115.528,91.242 r270 top value=10k
R19 "Comment" R_0402_1005Metric_Pad0.72x0.64mm_HandSolder 104.303,90.317 r270 top value=10k
R20 "Comment" R_0603_1608Metric_Pad0.98x0.95mm_HandSolder 104.303,86.592 r270 top value=147k
R21 "Comment" R_0603_1608Metric_Pad0.98x0.95mm_HandSolder 123.103,91.58 r90 top value=5k
R22 "Comment" R_0603_1608Metric_Pad0.98x0.95mm_HandSolder 114.79,84.342 r0 top value=1k
R23 "Comment" R_0603_1608Metric_Pad0.98x0.95mm_HandSolder 105.225,80.392 r0 top value=1k
R24 "Comment" R_0603_1608Metric_Pad0.98x0.95mm_HandSolder 117.828,68.842 r270 top value=10k
R25 "Comment" R_0603_1608Metric_Pad0.98x0.95mm_HandSolder 95.628,69.342 r270 top value=10k
R27 "Comment" R_0603_1608Metric_Pad0.98x0.95mm_HandSolder 116.978,89.717 r270 top value=10k
R28 "Comment" R_0603_1608Metric_Pad0.98x0.95mm_HandSolder 88.28,83.125 r0 top value=10k
U1 "Comment" MSOP-12-1EP_3x4.039mm_P0.65mm_EP1.651x2.845mm#1 88.31,75.532 r270 top value=LT3045xMSE
U2 "Comment" QFN65P500X500X100-21N 96.623,85.867 r270 top value=TPS7A4701RGWR
U3 "Comment" SOP65P640X120-21N 107.863,69.917 r0 top value=LT8471EFE_TRPBF
U4 "Comment" MSOP-12-1EP_3x4.039mm_P0.65mm_EP1.651x2.845mm#2 111.703,91.942 r180 top value=LT3094xMSE
U5 "Comment" JST_GH_SM03B-GHS-TB_1x03-1MP_P1.25mm_Horizontal 103.028,100.717 r180 top value=~
U6 "Comment" JST_GH_SM02B-GHS-TB_1x02-1MP_P1.25mm_Horizontal 112.503,100.742 r180 top value=~
U7 "Comment" JST_GH_SM02B-GHS-TB_1x02-1MP_P1.25mm_Horizontal 93.603,100.717 r180 top value=~

## Footprints (in the part's own frame and the unit in brackets; to place one, negate y for a bottom-side part, rotate by r counter-clockwise, add the part's x,y. Pads: shape width x height; smd on the part's side, far side on the other; paste and mask are expansions set on the pad)
C_0402_1005Metric_Pad0.74x0.62mm_HandSolder [mm]
  rrect25% 0.735x0.62 smd paste-0.735 mask-0.735: 1(-0.567,0) 2(0.567,0)
  F.SilkS lines w0.254: 0.116,-0.36 -0.116,-0.36 ; 0.116,0.36 -0.116,0.36
  F.CrtYd lines w0.254: 1.09,-0.46 -1.09,-0.46 -1.09,0.46 1.09,0.46 1.09,-0.46
C_0603_1608Metric_Pad1.08x0.95mm_HandSolder [mm]
  rrect25% 1.075x0.95 smd paste-1.075 mask-1.075: 1(-0.863,0) 2(0.863,0)
  F.SilkS lines w0.254: 0.146,0.51 -0.146,0.51 ; 0.146,-0.51 -0.146,-0.51
  F.CrtYd lines w0.254: 1.65,0.73 1.65,-0.73 -1.65,-0.73 -1.65,0.73 1.65,0.73
C_0805_2012Metric_Pad1.18x1.45mm_HandSolder [mm]
  rrect21% 1.175x1.45 smd paste-1.45 mask-1.45: 1(-1.038,0) 2(1.038,0)
  F.SilkS lines w0.254: -0.261,-0.735 0.261,-0.735 ; -0.261,0.735 0.261,0.735
  F.CrtYd lines w0.254: -1.88,-0.98 -1.88,0.98 1.88,0.98 1.88,-0.98 -1.88,-0.98
C_1210_3225Metric_Pad1.33x2.70mm_HandSolder [mm]
  rrect19% 1.325x2.7 smd paste-2.7 mask-2.7: 1(-1.562,0) 2(1.562,0)
  F.SilkS lines w0.254: -0.711,-1.36 0.711,-1.36 ; -0.711,1.36 0.711,1.36
  F.CrtYd lines w0.254: -2.48,-1.6 -2.48,1.6 2.48,1.6 2.48,-1.6 -2.48,-1.6
D_SOD-123 [mm]
  rrect25% 0.9x1.2 smd paste-1.2 mask-1.2: 1(-1.65,0) 2(1.65,0)
  F.SilkS lines w0.254: 1.65,-1 -2.36,-1 -2.36,1 1.65,1
  F.CrtYd lines w0.254: -2.35,-1.15 -2.35,1.15 2.35,1.15 2.35,-1.15 -2.35,-1.15
JST_GH_SM02B-GHS-TB_1x02-1MP_P1.25mm_Horizontal [mm]
  rrect25% 0.6x1.7 smd paste-1.7 mask-1.7: 1(-0.625,1.85) 2(0.625,1.85)
  rrect25% 1x2.7 smd paste-2.7 mask-2.7: MP(-2.475,-1.35) MP(2.475,-1.35)
  F.SilkS lines w0.254: 2.985,0.26 2.985,1.71 1.185,1.71 ; 1.715,-2.56 -1.715,-2.56 ; -1.185,2.7 -1.185,1.71 -2.985,1.71 -2.985,0.26
  F.CrtYd lines w0.254: 3.48,0.5 3.38,0.5 3.38,2.1 1.43,2.1 1.43,3.2 -1.43,3.2 -1.43,2.1 -3.38,2.1 -3.38,0.5 -3.48,0.5 -3.48,-3.2 -1.47,-3.2 -1.47,-2.95 1.47,-2.95 1.47,-3.2 3.48,-3.2 3.48,0.5
JST_GH_SM03B-GHS-TB_1x03-1MP_P1.25mm_Horizontal [mm]
  rrect25% 0.6x1.7 smd paste-1.7 mask-1.7: 1(-1.25,1.85) 2(0,1.85) 3(1.25,1.85)
  rrect25% 1x2.7 smd paste-2.7 mask-2.7: MP(-3.1,-1.35) MP(3.1,-1.35)
  F.SilkS lines w0.254: 3.61,0.26 3.61,1.71 1.81,1.71 ; 2.34,-2.56 -2.34,-2.56 ; -1.81,2.7 -1.81,1.71 -3.61,1.71 -3.61,0.26
  F.CrtYd lines w0.254: -4.1,0.5 -4,0.5 ; -4,0.5 -4.1,-3.2 -2.1,-3.2 -2.1,-2.95 2.1,-2.95 2.1,-3.2 4.1,-3.2 4.1,0.5 4,0.5 4,2.1 2.05,2.1 2.05,3.2 -2.05,3.2 -2.05,2.1 -4,2.1 -4,0.5
L_Coilcraft_XAL5030-XXX [mm]
  rrect21% 1.18x4.7 smd paste-4.7 mask-4.7: 1(-1.655,0) 2(1.655,0)
  F.SilkS lines w0.254: -2.85,2.95 2.85,2.95 2.85,-2.95 -2.85,-2.95 -2.85,2.95
  F.CrtYd lines w0.254: -2.99,3.09 -2.99,-3.09 2.99,-3.09 2.99,3.09 -2.99,3.09
L_Coilcraft_XAL7030-102 [mm]
  rrect14% 1.78x6.5 smd paste-6.5 mask-6.5: 1(-2.36,0) 2(2.36,0)
  F.SilkS lines w0.254: -4.11,4.11 4.11,4.11 4.11,-4.11 -4.11,-4.11 -4.11,4.11
  F.CrtYd lines w0.254: -4.25,4.25 -4.25,-4.25 4.25,-4.25 4.25,4.25 -4.25,4.25
LED_0603_1608Metric_Pad1.05x0.95mm_HandSolder [mm]
  rrect25% 1.05x0.95 smd paste-1.05 mask-1.05: 1(-0.875,0) 2(0.875,0)
  F.SilkS lines w0.254: 0.8,-0.735 -1.66,-0.735 -1.66,0.735 0.8,0.735
  F.CrtYd lines w0.254: 1.65,-0.73 -1.65,-0.73 -1.65,0.73 1.65,0.73 1.65,-0.73
LOGO [mm]
  B.SilkS region: 5.249,2.667 5.207,2.625 5.165,2.667 5.207,2.709
  B.SilkS region: 5.08,2.582 5.038,2.54 4.995,2.582 5.038,2.625
  B.SilkS region: 4.487,-2.498 4.445,-2.54 4.403,-2.498 4.445,-2.455
  B.SilkS region: 4.318,2.413 4.276,2.371 4.233,2.413 4.276,2.455
  B.SilkS region: 4.149,4.191 4.106,4.149 4.064,4.191 4.106,4.233
  B.SilkS region: 3.302,-3.598 3.26,-3.641 3.217,-3.598 3.26,-3.556
  B.SilkS region: 0.423,-2.921 0.381,-2.963 0.339,-2.921 0.381,-2.879
  B.SilkS region: -1.524,5.038 -1.566,4.995 -1.609,5.038 -1.566,5.08
  B.SilkS region: -1.778,-4.953 -1.82,-4.995 -1.863,-4.953 -1.82,-4.911
  B.SilkS region: -3.387,-3.006 -3.429,-3.048 -3.471,-3.006 -3.429,-2.963
  B.SilkS region: 4.278,1.687 4.29,1.637 4.277,1.627 4.177,1.637 4.164,1.662 4.233,1.693
  B.SilkS region: 1.929,5.717 1.919,5.616 1.894,5.603 1.863,5.673 1.869,5.717 1.919,5.729
  B.SilkS region: 0.129,-0.937 0.141,-0.988 0.129,-0.998 0.028,-0.988 0.015,-0.962 0.085,-0.931
  B.SilkS region: -0.187,3.092 -0.198,2.992 -0.223,2.978 -0.254,3.048 -0.248,3.093 -0.198,3.104
  B.SilkS region: -2.58,-3.647 -2.568,-3.697 -2.581,-3.707 -2.681,-3.697 -2.694,-3.672 -2.625,-3.641
  B.SilkS region: 4.535,3.298 4.614,3.217 4.63,3.187 4.624,3.133 4.609,3.136 4.53,3.217 4.514,3.247 4.52,3.302
  B.SilkS region: 3.81,-3.335 3.796,-3.395 3.683,-3.502 3.604,-3.528 3.562,-3.499 3.607,-3.351 3.675,-3.248 3.766,-3.228
  B.SilkS region: 3.148,4.4 3.26,4.318 3.273,4.285 3.227,4.233 3.202,4.236 3.09,4.318 3.077,4.35 3.123,4.403
  B.SilkS region: 0.105,-1.611 0.169,-1.693 0.167,-1.714 0.085,-1.778 0.064,-1.776 0,-1.693 0.002,-1.673 0.085,-1.609
  B.SilkS region: 0.165,-0.673 0.1,-0.78 0.043,-0.825 0,-0.793 0.001,-0.779 0.056,-0.649 0.068,-0.639 0.157,-0.636
  B.SilkS region: -0.111,-0.953 -0.098,-1.034 -0.111,-1.249 -0.119,-1.273 -0.141,-1.255 -0.15,-1.101 -0.149,-1.043 -0.136,-0.926
  B.SilkS region: 0.219,-0.009 0.238,-0.102 0.122,-0.295 0.049,-0.387 0.013,-0.397 0.034,-0.252 0.06,-0.11 0.078,-0.021 0.082,-0.017 0.169,0
  B.SilkS region: 3.549,4.084 3.74,3.997 3.799,3.968 3.995,3.826 4.097,3.683 4.118,3.63 4.235,3.438 4.407,3.226 4.44,3.189 4.639,2.935 4.752,2.73 4.767,2.598 4.675,2.565 4.566,2.589 4.382,2.706 4.336,2.909 4.337,2.933 4.286,3.139 4.166,3.363 4.138,3.403 4.025,3.592 3.979,3.717 3.975,3.745 3.89,3.81 3.856,3.799 3.86,3.712 3.881,3.663 3.817,3.678 3.776,3.712 3.758,3.787 3.736,3.862 3.616,3.986 3.556,4.037 3.493,4.098
  B.SilkS region: 5.045,2.302 5.252,2.11 5.301,2.046 5.403,1.854 5.507,1.604 5.593,1.35 5.644,1.145 5.639,1.039 5.638,0.99 5.719,0.873 5.792,0.779 5.837,0.599 5.757,0.466 5.732,0.433 5.69,0.267 5.673,0.023 5.638,-0.296 5.528,-0.528 5.511,-0.547 5.435,-0.673 5.49,-0.753 5.546,-0.827 5.461,-0.931 5.392,-1.017 5.372,-1.161 5.383,-1.214 5.333,-1.227 5.283,-1.229 5.249,-1.34 5.245,-1.392 5.195,-1.574 5.111,-1.77 5.021,-1.92 4.953,-1.967 4.952,-1.967 4.865,-2.002 4.72,-2.119 4.666,-2.164 4.538,-2.221 4.498,-2.147 4.566,-1.959 4.612,-1.839 4.566,-1.762 4.52,-1.696 4.549,-1.566 4.562,-1.509 4.61,-1.29 4.613,-1.02 4.614,-0.825 4.703,-0.707 4.798,-0.631 4.811,-0.488 4.693,-0.357 4.687,-0.354 4.621,-0.288 4.65,-0.189 4.786,-0.013 4.829,0.04 4.957,0.264 4.961,0.464 4.902,0.593 4.794,0.627 4.732,0.627 4.649,0.719 4.62,0.866 4.67,0.995 4.697,1.099 4.662,1.291 4.612,1.408 4.576,1.494 4.483,1.609 4.461,1.635 4.435,1.677 4.551,1.666 4.721,1.666 4.805,1.751 4.75,1.895 4.714,1.99 4.704,2.015 4.763,2.223 4.836,2.349 4.919,2.379 hole: 4.953,2.032 4.911,1.99 4.953,1.947 4.995,1.99 hole: 5.16,1.693 5.129,1.687 5.122,1.609 5.14,1.583 5.212,1.524 5.22,1.526 5.249,1.609 5.246,1.632 hole: 5.075,1.439 4.987,1.408 4.991,1.28 5.126,1.061 5.239,0.902 5.322,0.751 5.315,0.696 5.213,0.757 5.165,0.787 5.122,0.757 5.105,0.614 5.108,0.33 5.122,0.101 5.163,-0.131 5.22,-0.23 5.247,-0.237 5.328,-0.221 5.38,-0.115 5.412,0.108 5.431,0.474 5.435,0.635 5.425,0.92 5.379,1.109 5.289,1.25 5.162,1.382 hole: 5.122,-1.524 5.08,-1.566 5.122,-1.609 5.165,-1.566
  B.SilkS region: 155 vertices and 8 holes, not listed, extent -2.06,-7.705 3.612,-1.727
  B.SilkS region: 473 vertices and 14 holes, not listed, extent -5.65,-4.269 2.989,7.244
MountingHole_2.7mm_M2.5_DIN965 [mm]
  round 2.7 hole 2.7 paste-2539.97 mask-2.7: Un1(0,0)
  Cmts.User circle w0.254: c0,0 r2.35
  F.CrtYd circle w0.254: c0,0 r2.6
MSOP-12-1EP_3x4.039mm_P0.65mm_EP1.651x2.845mm#1 [mm]
  rrect25% 1.45x0.4 smd paste-1.45 mask-1.45: 1(-2.15,1.625) 2(-2.15,0.975) 3(-2.15,0.325) 4(-2.15,-0.325) 5(-2.15,-0.975) 6(-2.15,-1.625) 7(2.15,-1.625) 8(2.15,-0.975) 9(2.15,-0.325) 10(2.15,0.325) 11(2.15,0.975) 12(2.15,1.625)
  rect 1.651x2.845 smd paste-2.845 mask-2.845: 13(0,0)
  rrect25% 0.67x1.15 on Mid13 paste-1.15 mask-1.15: Un1(-0.415,0.71) Un2(-0.415,-0.71) Un3(0.415,0.71) Un4(0.415,-0.71)
  F.SilkS region: -2.187,2.085 -2.428,2.415 -1.947,2.415
  F.SilkS lines w0.254: 1.5,2.13 0,2.13 -1.5,2.13
  F.CrtYd lines w0.254: 1.75,-2.27 1.75,-2.08 3.13,-2.08 3.13,2.08 1.75,2.08 1.75,2.27 -1.75,2.27 -1.75,2.08 -3.13,2.08 -3.13,-2.08 -1.75,-2.08 -1.75,-2.27 1.75,-2.27
MSOP-12-1EP_3x4.039mm_P0.65mm_EP1.651x2.845mm#2 [mm]
  rrect25% 1.45x0.4 smd paste-1.45 mask-1.45: 1(-2.15,1.625) 2(-2.15,0.975) 3(-2.15,0.325) 4(-2.15,-0.325) 5(-2.15,-0.975) 6(-2.15,-1.625) 7(2.15,-1.625) 8(2.15,-0.975) 9(2.15,-0.325) 10(2.15,0.325) 11(2.15,0.975) 12(2.15,1.625)
  rect 1.651x2.845 smd paste-2.845 mask-2.845: 13(0,0)
  rrect25% 0.67x1.15 on Mid13 paste-1.15 mask-1.15: Un1(-0.415,0.71) Un2(-0.415,-0.71) Un3(0.415,0.71) Un4(0.415,-0.71)
  F.SilkS region: -2.187,2.085 -2.428,2.415 -1.947,2.415
  F.SilkS lines w0.254: 1.5,2.13 0,2.13 -1.5,2.13 ; 1.5,-2.13 0,-2.13 -1.5,-2.13
  F.CrtYd lines w0.254: 3.13,2.08 1.75,2.08 1.75,2.27 -1.75,2.27 -1.75,2.08 -3.13,2.08 -3.13,-2.08 -1.75,-2.08 -1.75,-2.27 1.75,-2.27 1.75,-2.08 3.13,-2.08 3.13,2.08
QFN65P500X500X100-21N [mm]
  rrect12% 1.05x0.34 smd paste-1.05 mask-1.05: 1(-2.36,1.3) 2(-2.36,0.65) 3(-2.36,0) 4(-2.36,-0.65) 5(-2.36,-1.3) 11(2.36,-1.3) 12(2.36,-0.65) 13(2.36,0) 14(2.36,0.65) 15(2.36,1.3)
  rrect12% 0.34x1.05 smd paste-1.05 mask-1.05: 6(-1.3,-2.36) 7(-0.65,-2.36) 8(0,-2.36) 9(0.65,-2.36) 10(1.3,-2.36) 16(1.3,2.36) 17(0.65,2.36) 18(0,2.36) 19(-0.65,2.36) 20(-1.3,2.36)
  rect 3.15x3.15 smd paste-3.15 mask-3.15: 21(0,0)
  F.SilkS circle w0.254: c-3.485,1.3 r0.1
  F.SilkS lines w0.254: 1.79,-2.5 2.5,-2.5 2.5,-1.79 ; -1.79,-2.5 -2.5,-2.5 -2.5,-1.79 ; 2.5,1.79 2.5,2.5 1.79,2.5 ; -2.5,1.79 -2.5,2.5 -1.79,2.5
  F.Paste region: -0.195,-1.195 -1.195,-1.195 -1.195,-0.195 -0.195,-0.195
  F.Paste region: 1.195,-1.195 0.195,-1.195 0.195,-0.195 1.195,-0.195
  F.Paste region: -0.195,0.195 -1.195,0.195 -1.195,1.195 -0.195,1.195
  F.Paste region: 1.195,0.195 0.195,0.195 0.195,1.195 1.195,1.195
  F.CrtYd lines w0.254: 3.135,-3.135 -3.135,-3.135 -3.135,3.135 3.135,3.135 3.135,-3.135
R_0402_1005Metric_Pad0.72x0.64mm_HandSolder [mm]
  rrect25% 0.715x0.64 smd paste-0.715 mask-0.715: 1(-0.597,0) 2(0.597,0)
  F.SilkS lines w0.254: -0.168,0.38 0.168,0.38 ; -0.168,-0.38 0.168,-0.38
  F.CrtYd lines w0.254: -1.11,0.47 1.11,0.47 1.11,-0.47 -1.11,-0.47 -1.11,0.47
R_0603_1608Metric_Pad0.98x0.95mm_HandSolder [mm]
  rrect25% 0.975x0.95 smd paste-0.975 mask-0.975: 1(-0.913,0) 2(0.913,0)
  F.SilkS lines w0.254: 0.255,0.523 -0.255,0.523 ; 0.255,-0.523 -0.255,-0.523
  F.CrtYd lines w0.254: 1.65,0.73 1.65,-0.73 -1.65,-0.73 -1.65,0.73 1.65,0.73
SOP65P640X120-21N [mm]
  rect 1.48x0.41 smd paste-1.48 mask-1.48: 1(-2.865,2.925) 2(-2.865,2.275) 3(-2.865,1.625) 4(-2.865,0.975) 5(-2.865,0.325) 6(-2.865,-0.325) 7(-2.865,-0.975) 8(-2.865,-1.625) 9(-2.865,-2.275) 10(-2.865,-2.925) 11(2.865,-2.925) 12(2.865,-2.275) 13(2.865,-1.625) 14(2.865,-0.975) 15(2.865,-0.325) 16(2.865,0.325) 17(2.865,0.975) 18(2.865,1.625) 19(2.865,2.275) 20(2.865,2.925)
  rect 2.74x3.86 smd paste-3.86 mask-3.86: 21(0,0)
  F.SilkS circle w0.254: c-4.25,2.925 r0.1
  F.SilkS lines w0.254: -2.25,-3.46 2.25,-3.46 ; -2.25,3.46 2.25,3.46
  F.Paste region: -0.155,0.155 -1.055,0.155 -1.055,1.615 -0.155,1.615
  F.Paste region: -0.155,-1.615 -1.055,-1.615 -1.055,-0.155 -0.155,-0.155
  F.Paste region: 1.055,0.155 0.155,0.155 0.155,1.615 1.055,1.615
  F.Paste region: 1.055,-1.615 0.155,-1.615 0.155,-0.155 1.055,-0.155
  F.CrtYd lines w0.254: -3.86,-3.55 -3.86,3.55 3.86,3.55 3.86,-3.55 -3.86,-3.55
SOT-23 [mm]
  rrect25% 1.475x0.6 smd paste-1.475 mask-1.475: 1(-0.937,0.95) 2(-0.937,-0.95) 3(0.937,0)
  F.SilkS region: -1.162,1.51 -1.402,1.84 -0.923,1.84
  F.SilkS lines w0.254: -0.65,1.56 0,1.56 0.65,1.56 ; -0.65,-1.56 0,-1.56 0.65,-1.56
  F.CrtYd lines w0.254: -0.9,1.7 -0.9,1.5 -1.93,1.5 -1.93,-1.5 -0.9,-1.5 -0.9,-1.7 0.9,-1.7 0.9,-0.55 1.93,-0.55 1.93,0.55 0.9,0.55 0.9,1.7 -0.9,1.7

## Part data
C1 C6 C7 C8 C9 Cby1 Cby2 Cby3 Cby5 Cby6 Cby7: library part C_0805_2012Metric_Pad1.18x1.45mm_HandSolder, "Capacitor SMD 0805 (2012 Metric), square (rectangular) end terminal, IPC-7351 nominal with elongated pad for handsoldering. (Body size source: IPC-SM-782 page 76, https://www.pcb-3d.com/wordpress/wp-content/uploads/ipc-sm-782a_amendment_1_and_2.pdf, https://docs.google.com/spreadsheets/d/1BsfQQcO9C6DZCsRaXUlFlo91Tg2WpOkGARC1WS5S8t0/edit?usp=sharing), generated with kicad-footprint-generator", Datasheet=~, Description="Unpolarized capacitor", ki_fp_filters=C_*
C2 C2in1 C3: library part C_0402_1005Metric_Pad0.74x0.62mm_HandSolder, "Capacitor SMD 0402 (1005 Metric), square (rectangular) end terminal, IPC-7351 nominal with elongated pad for handsoldering. (Body size source: IPC-SM-782 page 76, https://www.pcb-3d.com/wordpress/wp-content/uploads/ipc-sm-782a_amendment_1_and_2.pdf), generated with kicad-footprint-generator", Datasheet=~, Description="Unpolarized capacitor", ki_fp_filters=C_*
C4 C5: library part C_0603_1608Metric_Pad1.08x0.95mm_HandSolder, "Capacitor SMD 0603 (1608 Metric), square (rectangular) end terminal, IPC-7351 nominal with elongated pad for handsoldering. (Body size source: IPC-SM-782 page 76, https://www.pcb-3d.com/wordpress/wp-content/uploads/ipc-sm-782a_amendment_1_and_2.pdf), generated with kicad-footprint-generator", Datasheet=~, Description="Unpolarized capacitor", ki_fp_filters=C_*
Cby4: library part C_1210_3225Metric_Pad1.33x2.70mm_HandSolder, "Capacitor SMD 1210 (3225 Metric), square (rectangular) end terminal, IPC-7351 nominal with elongated pad for handsoldering. (Body size source: IPC-SM-782 page 76, https://www.pcb-3d.com/wordpress/wp-content/uploads/ipc-sm-782a_amendment_1_and_2.pdf), generated with kicad-footprint-generator", Datasheet=~, Description="Unpolarized capacitor", ki_fp_filters=C_*
D1 D2 D5 D6 D7: library part LED_0603_1608Metric_Pad1.05x0.95mm_HandSolder, "LED SMD 0603 (1608 Metric), square (rectangular) end terminal, IPC-7351 nominal, (Body size source: http://www.tortai-tech.com/upload/download/2011102023233369053.pdf), generated with kicad-footprint-generator", Datasheet=~, Description="Light emitting diode", ki_fp_filters="LED* LED_SMD:* LED_THT:*"
D3 D4: library part D_SOD-123, "SOD-123", Datasheet=~, Description=Diode, Sim.Device=D, Sim.Pins="1=K 2=A", ki_fp_filters="TO-???* *_Diode_* *SingleDiode* D_*"
G***: library part LOGO
H1 H2 H3 H4: library part MountingHole_2.7mm_M2.5_DIN965, "Mounting Hole 2.7mm, M2.5, no annular, generated by kicad-footprint-generator mountinghole.py", Datasheet=~, Description="Mounting Hole without connection", ki_fp_filters=MountingHole*
L1 L2: library part L_Coilcraft_XAL7030-102, "Inductor, Coilcraft, XAL7030-102, 8.0x8.0x3.1mm, (https://www.coilcraft.com/getmedia/0d05a05e-d55d-4a0c-911d-46bd73686633/xal7030.pdf), generated with kicad-footprint-generator gen_inductor.py", Datasheet="Coilcraft XAL7030", Description=Inductor, ki_fp_filters="Choke_* *Coil* Inductor_* L_*"
  L1: Website=https://www.digikey.com/en/products/detail/coilcraft/LPS4018-682MRC/12714582
  L2: Website=https://www.digikey.com/en/products/detail/w%C3%BCrth-elektronik/74437324068/2791049
L3: library part L_Coilcraft_XAL5030-XXX, "Inductor, Coilcraft, XAL5030-XXX, 5.48x5.68x3.1mm, (https://www.coilcraft.com/getmedia/49bc46c8-4b2c-45b9-9b6c-2eaa235ea698/xal50xx.pdf), generated with kicad-footprint-generator gen_inductor.py", Datasheet="Coilcraft XAL5030", Description=Inductor, Website=https://www.digikey.com/en/products/detail/w%C3%BCrth-elektronik/74437324033/2791046, ki_fp_filters="Choke_* *Coil* Inductor_* L_*"
Q1 Q2 Q3: library part SOT-23, "SOT, 3 Pin (JEDEC TO-236 Var AB https://www.jedec.org/document_search?search_api_views_fulltext=TO-236), generated with kicad-footprint-generator ipc_gullwing_generator.py", Datasheet=https://www.onsemi.com/pub/Collateral/BC818-D.pdf, Description="0.8A Ic, 45V Vce, NPN Transistor, SOT-23", ki_fp_filters=SOT?23*
R1 R3 R5 R6 R11 R14 R15 R16 R17 R20 R21 R22 R23 R24 R25 R27 R28: library part R_0603_1608Metric_Pad0.98x0.95mm_HandSolder, "Resistor SMD 0603 (1608 Metric), square (rectangular) end terminal, IPC-7351 nominal with elongated pad for handsoldering. (Body size source: IPC-SM-782 page 72, https://www.pcb-3d.com/wordpress/wp-content/uploads/ipc-sm-782a_amendment_1_and_2.pdf), generated with kicad-footprint-generator", Datasheet=~, Description=Resistor, ki_fp_filters=R_*
  R11: Website=https://www.digikey.in/en/products/detail/yageo/RC0402FR-073K48L/5281008
  R16 R17: Website=https://www.digikey.com/en/products/detail/susumu/RG1608P-683-B-T5/1228890
  R24 R25 R27 R28: Website=https://www.digikey.lv/en/products/detail/panasonic-electronic-components/ERA-3AEB103V/1465878
R2 R4 R7 R8 R9 R10 R12 R13 R18 R19: library part R_0402_1005Metric_Pad0.72x0.64mm_HandSolder, "Resistor SMD 0402 (1005 Metric), square (rectangular) end terminal, IPC-7351 nominal with elongated pad for handsoldering. (Body size source: IPC-SM-782 page 72, https://www.pcb-3d.com/wordpress/wp-content/uploads/ipc-sm-782a_amendment_1_and_2.pdf), generated with kicad-footprint-generator", Datasheet=~, Description=Resistor, ki_fp_filters=R_*
  R10: Website=https://www.digikey.be/en/products/detail/stackpole-electronics-inc/RMCF0402FT23K7/1714563
U1 U4: library part MSOP-12-1EP_3x4.039mm_P0.65mm_EP1.651x2.845mm, "MSOP, 12 Pin (https://www.analog.com/media/en/package-pcb-resources/package/pkg_pdf/ltc-legacy-msop/05081666_g_mse12.pdf), generated with kicad-footprint-generator ipc_gullwing_generator.py", ki_fp_filters=MSOP*1EP*3x4.039mm*P0.65mm*
  U1: Datasheet=https://www.analog.com/media/en/technical-documentation/data-sheets/3045fa.pdf, Description="500mA, Adjustable, Ultralow Noise, Ultrahigh PSRR Linear Regulator, MSOP-12"
  U4: Datasheet=https://www.analog.com/media/en/technical-documentation/data-sheets/LT3094.pdf, Description="-500mA, Adjustable, Ultralow Noise, Ultrahigh PSRR RF Negative Linear Regulator, MSOP-12"
U2: library part QFN65P500X500X100-21N
U3: library part SOP65P640X120-21N, "Conv DC-DC Triple Non-Inv/Inv/Step Up/Step Down 2.6V to 50V 20-Pin TSSOP EP", MAXIMUM_PACKAGE_HEIGHT="1.2 mm", Package="TSSOP -20 Analog Devices", MANUFACTURER="Analog Devices", MF="Analog Devices", Price=None, Check_prices=https://www.snapeda.com/parts/LT8471EFE%23TRPBF/Analog+Devices/view-part/?ref=eda, STANDARD=IPC-7351B, PARTREV=D, SnapEDA_Link=https://www.snapeda.com/parts/LT8471EFE%23TRPBF/Analog+Devices/view-part/?ref=snap, MP=LT8471EFE#TRPBF, Description_1="\n                        \n                            Dual Multitopology DC/DC Converters with 2A Switches and Synchronization\n                        \n", Availability="In Stock"
U5: library part JST_GH_SM03B-GHS-TB_1x03-1MP_P1.25mm_Horizontal, "JST GH series connector, SM03B-GHS-TB (http://www.jst-mfg.com/product/pdf/eng/eGH.pdf), generated with kicad-footprint-generator"
U6 U7: library part JST_GH_SM02B-GHS-TB_1x02-1MP_P1.25mm_Horizontal, "JST GH series connector, SM02B-GHS-TB (http://www.jst-mfg.com/product/pdf/eng/eGH.pdf), generated with kicad-footprint-generator"

## Free pads (board coordinates)
  rect 2.4x1.5 smd: 1(88.985,77.672)
  rect 1.5x1.7 smd: 1(109.553,90.967)
  round 0.025 smd: 1(111.728,92.517) 1(116.7,59.95) 1(119.518,78.98)
  rect 3.7x1.7 smd: 1(112.728,90.967)

## Via types
v1: diameter 0.8, hole 0.4, F.Cu to B.Cu, tented both sides, 87 vias
v2: diameter 0.6, hole 0.3, F.Cu to B.Cu, tented both sides, 4 vias

## Nets (pads, with @x,y where several pads share a name; then routed paths per layer and width w, separated by ;. In a path a pad name is that pad's centre, name@x,y a point inside that pad or via, vN(x,y) a via of type N, cw(c..) or ccw(c..) an arc to the next point about the centre after c; other vN are vias at no path point)
+5.5V: Cby4.1 R7.1 U2.1 U2.20 U5.3 | length 13.6
  F.Cu w0.254: R7.1 97.805,91.112 Cby4.1@97.923,91.231 ; U2.1 Cby4.1@97.923,91.231 ; Cby4.1 Cby4.1@97.923,91.231
  F.Cu w0.4: Cby4.1 98.26,93.524 101.778,97.042 U5.3
+5V: C1.1 R3.2 U1.10 U1.11 U1.12 U7.2 | length 42.4
  F.Cu w0.4: U1.11@89.278,73.38 90.278,72.38 C1.1 R3.2 ; v1(90.253,67.955) R3.2@90.253,69.217 ; v1(92.978,97.355) v1(92.978,100.355)
  B.Cu w0.4: v1(90.253,67.955) 90.174,68.033 90.174,90.888 92.978,93.692 v1(92.978,100.355)
+6V: C6.1 C8.1 Cby1.1 Cby3.1 L3.2 pad.1@88.985,77.672 R5.2 R17.1 R21.2 R23.1 U1.1 U1.2 U1.3 U1.4 U2.13 U2.15 U2.16 | length 95
  F.Cu w0.3: v1(87.378,92.392) v1@87.381,92.39 ; U1.1 pad.1@89.938,77.685 ; Cby1.1@92.685,77.685 Cby1.1@92.788,77.582 ; v2(96.498,82.167) 96.623,82.292 U2.13 ; L3.2 100.078,78.817 v1(100.103,78.842) ; R23.1@104.303,80.382 R23.1 ; C6.1@106.453,77.617 106.528,77.692 C6.1
  F.Cu w0.4: pad.1@88.985,77.672 89.285,77.672 U1.2 ; pad.1@89.285,77.702 89.935,77.702 92.685,77.702 92.885,77.702 96.788,77.702 ; Cby1.1@92.868,77.702 Cby1.1@92.885,77.685 ; R17.1 95.628,76.542 96.788,77.702 ; Cby3.1 98.608,79.172 L3.2 ; Cby3.1@98.623,81.337 98.623,83.817 ; L3.2@100.061,77.685 L3.2 ; v1(121.928,92.492) R21.2 ; 96.788,77.702 97.178,77.702 ; 96.788,77.702 97.178,77.702 ; 97.178,77.702 97.628,77.702 ; 97.178,77.702 97.628,77.702 ; 97.628,77.702 L3.2 ; 97.628,77.702 L3.2
  F.Cu w0.5: R5.2 v1@87.381,92.39 ; C8.1 R23.1@104.303,80.382
  F.Cu w1: L3.2@100.178,77.702 106.618,77.702 C6.1
  B.Cu w0.3: v1(100.103,78.842) 103.128,78.842 116.778,92.492 v1(121.928,92.492)
  In2.Cu w0.3: v2(96.498,82.167) 99.823,78.842 v1(100.103,78.842)
  In2.Cu w0.4: v1(87.378,92.392) 86.205,91.22 86.205,85.365 92.728,78.842 v1(100.103,78.842)
+11.1V: L1.1 pad.1@116.7,59.95 R6.2 R10.2 U3.1 U3.20 U6.1 | length 10.7
  F.Cu w0.3: v1(90.265,61.942) R6.2 ; v1(97.673,66.242) R10.2
  F.Cu w0.35: U3.1 U3.20
  F.Cu w0.4: v1(113.128,97.542) U6.1 v1(113.128,100.242)
  other v1: 114.328,59.042 115.128,59.042 115.928,59.042 116.728,59.042 117.528,59.042 118.328,59.042 119.128,59.042 107.878,72.842
-5.5V: Cby7.1 pad.1@109.553,90.967 R19.1 U4.10 U4.11 U4.12 U5.2 | length 14.3
  F.Cu w0.4: U5.2 103.028,91.367 103.54,90.855 107.888,90.855 107.901,90.867 107.913,90.855 109.44,90.855 U4.11
-6V: C7.2 C9.2 Cby5.1 L2.2 pad.1@111.728,92.517 pad.1@112.728,90.967 R16.1 R22.1 U3.19 U4.1 U4.2 U4.3 U4.13 | length 26.7
  F.Cu w0.3: U3.19 111.603,72.192 113.053,73.642 R16.1 113.903,74.477 114.368,74.942 L2.2
  F.Cu w0.4: U4.1 113.878,90.292 R22.1 113.878,83.542 114.368,83.052 L2.2
  F.Cu w1: C7.2 113.095,77.705 L2.2
GND: C1.2 C2.2 C2in1.2 C3.2 C4.1 C5.2 C6.2 C7.1 C8.2 C9.1 Cby1.2 Cby2.2 Cby3.2 Cby4.2 Cby5.2 Cby6.2 Cby7.2 D1.1 D2.1 D5.1 D6.1 D7.1 L2.1 pad.1@119.518,78.98 Q1.2 Q2.2 Q3.2 R1.2 R4.1 R8.2 R9.2 R11.1 R14.2 R15.2 R20.2 R24.2 R25.2 R27.2 R28.2 U1.6 U1.9 U1.13 U2.7 U2.17 U2.18 U2.19 U2.21 U3.9 U3.10 U3.11 U3.12 U3.21 U4.6 U4.9 U5.1 U6.2 U7.1 | length 92.6
  F.Cu w0.254: U3.10 106.496,66.992 106.821,67.317 v1(106.828,67.317) 106.68,67.317 106.391,67.606 105.034,67.606 U3.9 ; v1(107.853,67.317) 107.853,69.907 U3.21 ; U3.11 109.282,66.992 108.957,67.317 v1(108.878,67.317) 109.026,67.317 109.351,67.642 U3.12
  F.Cu w0.3: Cby2.2@85.175,70.16 Cby2.2 ; U1.9 87.986,72.322 v1(88.485,71.822) ; U1.13@87.986,75.207 U1.13 ; v1@93.223,86.507 U2.7@94.253,86.507 ; U2.7 U2.21@95.973,86.517 ; v1(99.228,65.242) R11.1 ; v1(101.028,65.255) R14.2 ; C4.1@115.665,71.955 C4.1 C4.1@115.787,72.076 ; C4.1@115.665,72.064 C4.1@115.678,72.076 ; v1(115.806,88.805) R27.2
  F.Cu w0.35: U2.21@97.273,86.517 100.154,86.517 100.485,86.848 v1@100.564,86.848 ; v1(108.028,91.942) 108.353,92.267 U4.9 ; U4.6 115.053,93.567 v1(115.303,93.817)
  F.Cu w0.4: v1(86.378,79.242) 86.686,78.935 U1.6 ; v1(86.385,75.072) U1.13@87.9,75.072 ; v1(86.385,76.072) U1.13@87.82,76.072 ; U1.13@87.82,76.022 U1.13 ; U1.13@87.9,75.122 U1.13 ; U1.13@88.376,75.597 U1.13 ; v1(89.178,92.342) 89.18,92.34 D1.1 ; R28.2 89.193,85.288 Q1.2@89.23,85.325 ; v1@89.741,66.552 v1@89.765,66.577 ; v1(91.028,75.61) Cby1.2 ; C1.2 v1(92.353,72.63) ; v1(94.228,97.355) v1(94.228,100.355) ; v1(95.628,67.242) R25.2 ; U2.21 100.823,85.867 v1(100.838,85.852) ; U2.21@97.273,85.217 100.108,85.217 100.489,84.836 v1(100.584,84.836) ; R11.1@99.241,66.63 R11.1 99.316,66.617 R11.1@99.328,66.63 ; C2.2 103.516,66.63 v1(103.528,66.642) ; v1(103.051,82.042) D6.1 ; v1(104.278,97.367) v1(104.278,100.367) ; Cby6.2 Cby6.2@106.485,95.017 ; v1(107.853,67.317) v1@107.863,67.327 ; U3.21@107.863,68.452 U3.21@107.863,69.357 ; v1(108.028,91.942) v1@108.228,91.942 ; v1(109.028,74.317) C7.1 ; v1(111.328,74.33) C9.1 ; v1(111.753,89.117) 111.753,87.655 Cby5.2 Cby5.2@111.765,88.217 ; v1(111.878,97.542) v1(111.878,100.242) ; v1(112.782,68.254) 112.802,68.275 C3.2 ; v1(115.678,70.717) C4.1 ; v1@116.728,67.93 R24.2 ; R27.2@117.003,88.78 R27.2 R27.2@117.015,88.767 ; v1(117.942,88.742) Q3.2 ; D7.1 v1@119.253,85.242 ; v1(121.828,86.992) D5.1
  F.Cu w0.5: Cby2.2 v1(85.213,71.431) ; R1.2 v1(85.486,68.767) ; v1@89.791,66.577 R4.1 ; v1(90.215,60.317) D2.1 ; R8.2 v1(95.373,92.212) ; C2in1.2 v1(95.383,82.067) ; Q2.2 98.278,62.092 v1(98.528,62.342) 99.602,62.342 R9.2 ; v1(100.228,71.042) C5.2@100.228,71.942 ; Cby3.2 100.697,81.681 100.697,82.917 v1(100.711,82.931) ; Cby4.2@101.285,91.007 101.443,90.85 101.443,89.557 v1(101.5,89.5) ; v1(104.303,74.317) C8.2 ; v1(104.303,84.492) R20.2 ; R15.2 v1(104.328,96.042) ; Cby7.2 108.015,88.78 v1(108.053,88.817) ; Cby6.2@106.485,95.017 v1(108.003,95.017) ; v1(106.628,74.317) C6.2
  other v1: 89.765,66.552 116.653,67.942 120.468,76.53 120.468,77.33 120.468,78.13 120.468,78.93 120.468,79.73 120.468,80.53 120.468,81.33 89.193,84.275 119.253,85.567 93.023,86.507 100.584,86.868
Net-(D1-A): D1.2 Q1.3 R5.1 | length 3.8
  F.Cu w0.3: R5.1 88.28,88.538 88.28,88.35 ; Q1.3 88.28,88.35 ; D1.2 88.28,88.575 88.28,88.35
Net-(D2-A): D2.2 Q2.3 R6.1 | length 3.2
  F.Cu w0.4: D2.2 94.115,61.142 94.128,61.142 ; R6.1 94.128,61.142 ; Q2.3@95.053,61.142 94.128,61.142
Net-(D3-A): D3.2 R12.2 | length 1.7
  F.Cu w0.4: D3.2 R12.2
Net-(D3-K): D3.1 D4.1 Q2.1 R9.1 | length 7.7
  F.Cu w0.4: Q2.1 98.202,60.192 98.652,60.192 R9.1 ; 100.175,61.145 R9.1 ; D3.1 101.378,59.997 100.231,61.145 ; D4.1 101.378,62.292 100.231,61.145 ; R9.1 100.231,61.145
Net-(D4-A): D4.2 R13.2 | length 1.7
  F.Cu w0.4: D4.2 R13.2
Net-(D5-A): D5.2 Q3.3 R21.1 | length 4.5
  F.Cu w0.3: Q3.3 122.153,89.692
  F.Cu w0.4: Q3.3 122.128,89.692 R21.1 R21.1@123.103,90.642 ; 122.153,89.692 D5.2
Net-(D6-A): D6.2 R23.2 | length 1.6
  F.Cu w0.4: R23.2 D6.2
Net-(D7-A): D7.2 R22.2 | length 1.7
  F.Cu w0.4: R22.2@115.778,84.342 117.49,84.342 D7.2
Net-(Q1-B): Q1.1 R2.2 R28.1 | length 4.1
  F.Cu w0.3: R2.2@87.328,81.65 R28.1@87.328,83.432 ; R28.1@87.344,83.101 R28.1
  F.Cu w0.4: Q1.1@87.331,85.325 87.368,85.288 R28.1 R28.1@87.345,83.103
Net-(Q3-B): Q3.1 R18.2 R27.1 | length 3.6
  F.Cu w0.3: R18.2@115.705,90.645 116.963,90.645 R27.1 ; Q3.1@119.141,90.63 Q3.1@119.203,90.692
  F.Cu w0.4: R27.1 R27.1@117.015,90.667
  F.Cu w0.5: R27.1 Q3.1@119.141,90.63
Net-(U1-PG): R2.1 U1.5 | length 2.8
  F.Cu w0.3: R2.1@87.328,80.445 87.335,80.437 U1.5
Net-(U1-PGFB): R3.1 R4.2 U1.7 | length 12.2
  F.Cu w0.3: v1(86.273,71.972) 86.686,72.384 U1.7
  F.Cu w0.4: R4.2@92.103,66.592 R3.1
  In2.Cu w0.3: v1(86.273,71.972) 86.273,71.727 88.383,69.617 90.203,69.617 92.003,67.817 v1(92.103,67.817) ; 92.053,67.717 92.053,68.03
Net-(U1-SET): Cby2.1 R1.1 U1.8 | length 5.8
  F.Cu w0.3: R1.1@87.163,67.615 R1.1@87.311,67.762 ; R1.1 87.311,70.1 Cby2.1 Cby2.1@87.335,70.17 ; Cby2.1@87.335,70.382 U1.8
  F.Cu w0.4: U1.8 U1.8@87.338,73.38
Net-(U2-NR): C2in1.1 U2.14 | length 2.8
  F.Cu w0.3: C2in1.1 97.273,81.822 U2.14
Net-(U2-SENSE{slash}FB): R7.2 R8.1 U2.3 | length 2.7
  F.Cu w0.3: R8.1 R7.2@96.373,89.917 ; R7.2 96.623,89.867 U2.3
Net-(U3-C3): L1.2 U3.13 | length 7.3
  F.Cu w0.3: U3.13 111.603,68.292 114.793,65.102 L1.2
Net-(U3-E1): L3.1 U3.2 | length 5.9
  F.Cu w0.3: L3.1@101.783,74.487 104.078,72.192 U3.2
  F.Cu w0.4: L3.1@100.078,74.487 L3.1@101.783,74.487
Net-(U3-FB1): R17.2 R25.1 U3.5 | length 13
  F.Cu w0.3: R17.2 R25.1 95.64,70.242 U3.5
Net-(U3-FB2): R16.2 R24.1 U3.16 | length 12.8
  F.Cu w0.3: U3.16 114.653,70.242 115.128,69.767 117.815,69.767 R24.1 117.828,72.792 116.978,73.642 R16.2
Net-(U3-OV{slash}UV): R10.1 R11.2 U3.6 | length 8.3
  F.Cu w0.3: R10.1@97.683,68.442 R11.2@99.373,68.442 ; R11.2 99.228,69.142 99.678,69.592 U3.6
Net-(U3-PG1): R13.1 U3.4 | length 13.5
  F.Cu w0.3: v1(103.278,71.042) 103.428,70.892 U3.4 U3.4@104.995,70.889
  F.Cu w0.4: R13.1 v1(108.526,62.442)
  B.Cu w0.4: v1@103.278,70.967 103.278,68.917 108.526,63.67 v1(108.526,62.442)
Net-(U3-PG2): R12.1 U3.17 | length 16.7
  F.Cu w0.3: U3.17 112.628,70.892 v1(112.777,71.042) v1(112.777,71.042)
  F.Cu w0.4: R12.1 v1(108.528,59.742)
  B.Cu w0.4: v1(108.528,59.742) 109.728,60.942 109.728,68.817 111.003,70.092 111.827,70.092 v1(112.777,71.042)
Net-(U3-RT): R14.1 U3.7 | length 4.2
  F.Cu w0.3: R14.1 101.515,68.942 U3.7
Net-(U3-SHOUT): C4.2 C5.1 U3.3 U3.14 U3.18 | length 22.7
  F.Cu w0.3: C5.1 101.987,72.209 103.116,72.209 103.783,71.542 U3.3 ; U3.14 v2@112.028,68.942 ; U3.18 112.103,71.542 v2(112.528,71.967) C4.2 ; C4.2@113.853,71.751 113.953,71.751 C4.2@113.912,71.792
  B.Cu w0.3: v2(103.15,72.175) 103.783,71.542 112.103,71.542 v2(112.528,71.967) 113.253,71.967 113.753,71.467 113.753,70.567 v2(112.078,68.892)
  In2.Cu w0.4: 112.5,71.967 v2(112.528,71.967)
Net-(U3-SS1): C2.1 U3.8 | length 2.7
  F.Cu w0.3: C2.1 102.951,67.765 103.478,68.292 U3.8
Net-(U3-SS2): C3.1 U3.15 | length 3
  F.Cu w0.3: U3.15 112.378,69.592 112.56,69.41 C3.1
Net-(U4-PG): R18.1 U4.4 | length 1.9
  F.Cu w0.3: U4.4 115.1,92.267 R18.1
Net-(U4-PGFB): R19.2 R20.1 U4.5 | length 17.4
  F.Cu w0.35: U4.5 v1(115.978,92.917)
  F.Cu w0.4: R20.1 R19.2
  B.Cu w0.3: v1(104.303,88.692) 106.278,88.692 110.503,92.917 v1@115.603,92.917
Net-(U4-SET): Cby6.1 R15.1 U4.8 | length 4.7
  F.Cu w0.4: R15.1 104.353,92.945 Cby6.1 106.511,92.917 U4.8@108.978,92.917
unconnected-(U2-0P1V-Pad12): U2.12
unconnected-(U2-0P2V-Pad11): U2.11
unconnected-(U2-0P4V-Pad10): U2.10
unconnected-(U2-0P8V-Pad9): U2.9
unconnected-(U2-1P6V-Pad8): U2.8
unconnected-(U2-3P2V-Pad6): U2.6
unconnected-(U2-6P4V1-Pad5): U2.5
unconnected-(U2-6P4V2-Pad4): U2.4
unconnected-(U2-NC_2-Pad2): U2.2
unconnected-(U4-VIOC-Pad7): U4.7
pads on no net: H1.Un1 H2.Un1 H3.Un1 H4.Un1 U1.Un1 U1.Un2 U1.Un3 U1.Un4 U4.Un1 U4.Un2 U4.Un3 U4.Un4 U5.MP U6.MP U7.MP
copper on no net: | length 627.9
  F.SilkS w0.254: 78.978,104.03 cw(c80.978,104.03) 80.978,106.03 ; 78.978,104.03 cw(c80.978,104.03) 80.978,106.03 ; 78.978,104.03 78.978,52.78 ccw(c80.978,52.78) 80.978,50.78 126.703,50.78 ccw(c126.703,52.78) 128.703,52.78 128.703,104.03 ccw(c126.703,104.03) 126.703,106.03 80.978,106.03
  B.SilkS w0.254: 78.953,52.792 ccw(c80.953,52.792) 80.953,50.792 126.778,50.792 ccw(c126.778,52.792) 128.778,52.792 128.778,103.942 ccw(c126.778,103.942) 126.778,105.942 80.953,105.942 ccw(c80.953,103.942) 78.953,103.942 78.953,52.792
  Edge.Cuts w0.254: 78.328,52.165 ccw(c80.328,52.165) 80.328,50.165 127.453,50.165 ccw(c127.453,52.165) 129.453,52.165 129.453,104.64 ccw(c127.453,104.64) 127.453,106.64 80.328,106.64 ccw(c80.328,104.64) 78.328,104.64 78.328,52.165

## Polygon pours and split planes (outlines as drawn)
+11.1V on In2.Cu "In2.Cu-/+11.1V" (solid, remove dead copper, pour order 3): 127.778,52.422 79.978,52.422 79.978,105.047 127.778,105.047
no net on F.Cu "NONET_L01_P004" (solid, pour order 4): 88.519,74.041 90.043,74.041 90.043,72.771 88.519,72.771
GND on In1.Cu "In1.Cu-GND" (solid, remove dead copper, pour order 0): 80.028,105.053 80.028,52.478 127.778,52.478 127.778,105.053

## Keep-outs
F.Cu:
  region: 120.24,58.067 113.19,58.067 113.19,66.267 120.215,66.292
B.Cu:
  region: 121.578,75.442 113.153,75.417 113.153,82.467 121.553,82.467
  region: 120.24,58.067 113.19,58.067 113.19,66.267 120.215,66.292
  region: 102.695,73.451 97.453,73.435 97.453,78.58 102.676,78.58
In1.Cu:
  region: 102.695,73.451 97.453,73.435 97.453,78.58 102.676,78.58
In2.Cu:
  region: 121.578,75.442 113.153,75.417 113.153,82.467 121.553,82.467
  region: 102.695,73.451 97.453,73.435 97.453,78.58 102.676,78.58

## Other copper
F.Cu:
  region net +5.5V: 99.523,87.742 99.523,87 98.45,87 98.45,87.525 98.275,87.7 97.75,87.7 97.75,88.717 98.548,88.717
  region net +6V: 99.5,84.019 98.448,82.967 97.75,82.967 97.75,84.019 98.45,84.019 98.475,84.044 98.475,84.725 99.5,84.725
  region net -6V: 110.953,91.717 112.503,91.717 112.503,93.317 110.953,93.317
  region net GND: 118.268,75.73 118.268,82.23 120.768,82.23 120.768,75.73
  region net +11.1V: 113.4,58.6 120,58.6 120,61.3 113.4,61.3
F.SilkS:
  text "R16" at 117.488,73.445 h0.7
B.SilkS:
  text "SL-sEMG&ADC-PSU v0.3" at 118.078,102.313 h1.5